# Altium PCB transistor_tester_V1.07_E3.PcbDoc (part 1 of 2)
Units mil, origin at the board's own origin, x right, y up, seen from the top; angles counter-clockwise.
Board outline 8661.42 x 7437.01 mil, 4 copper layers (Component Side, Ground Plane, Power Plane, Solder Side), stack 33.234 mil thick; 260 components, 161 nets, 897 pads, 860 vias.
Unrouted connection lines stored in the file: 9.
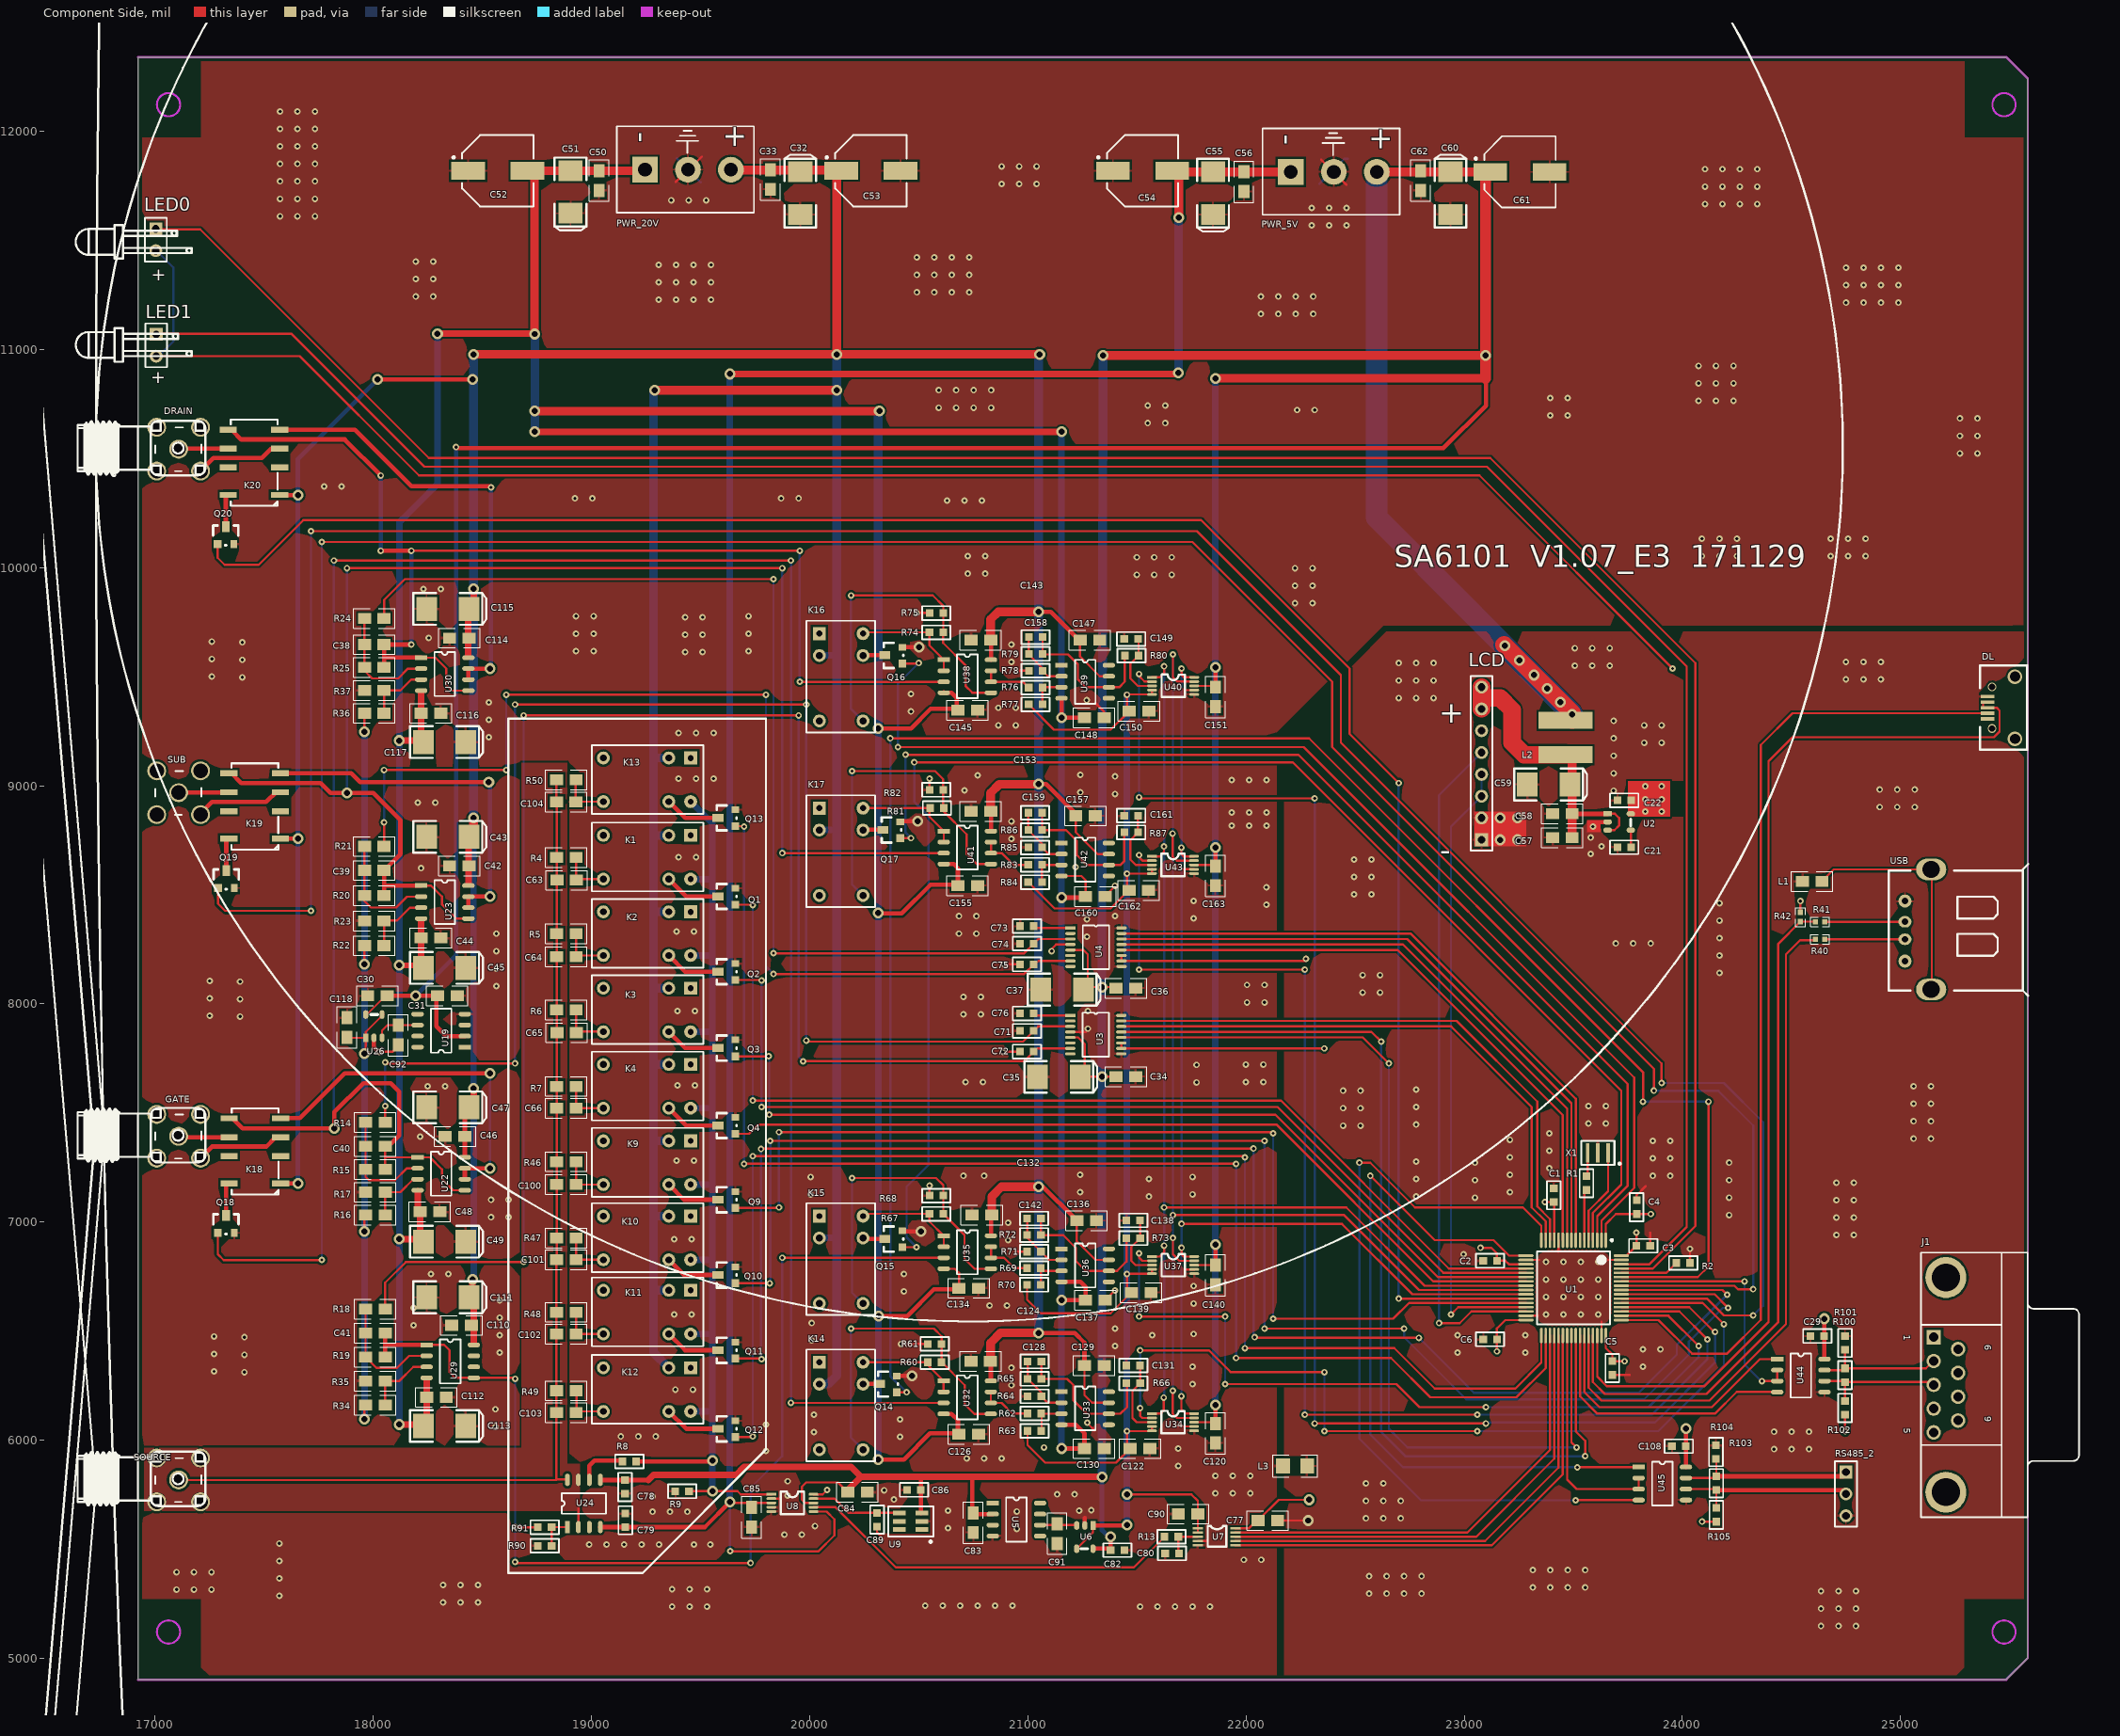
[diagram p0: Component Side view]
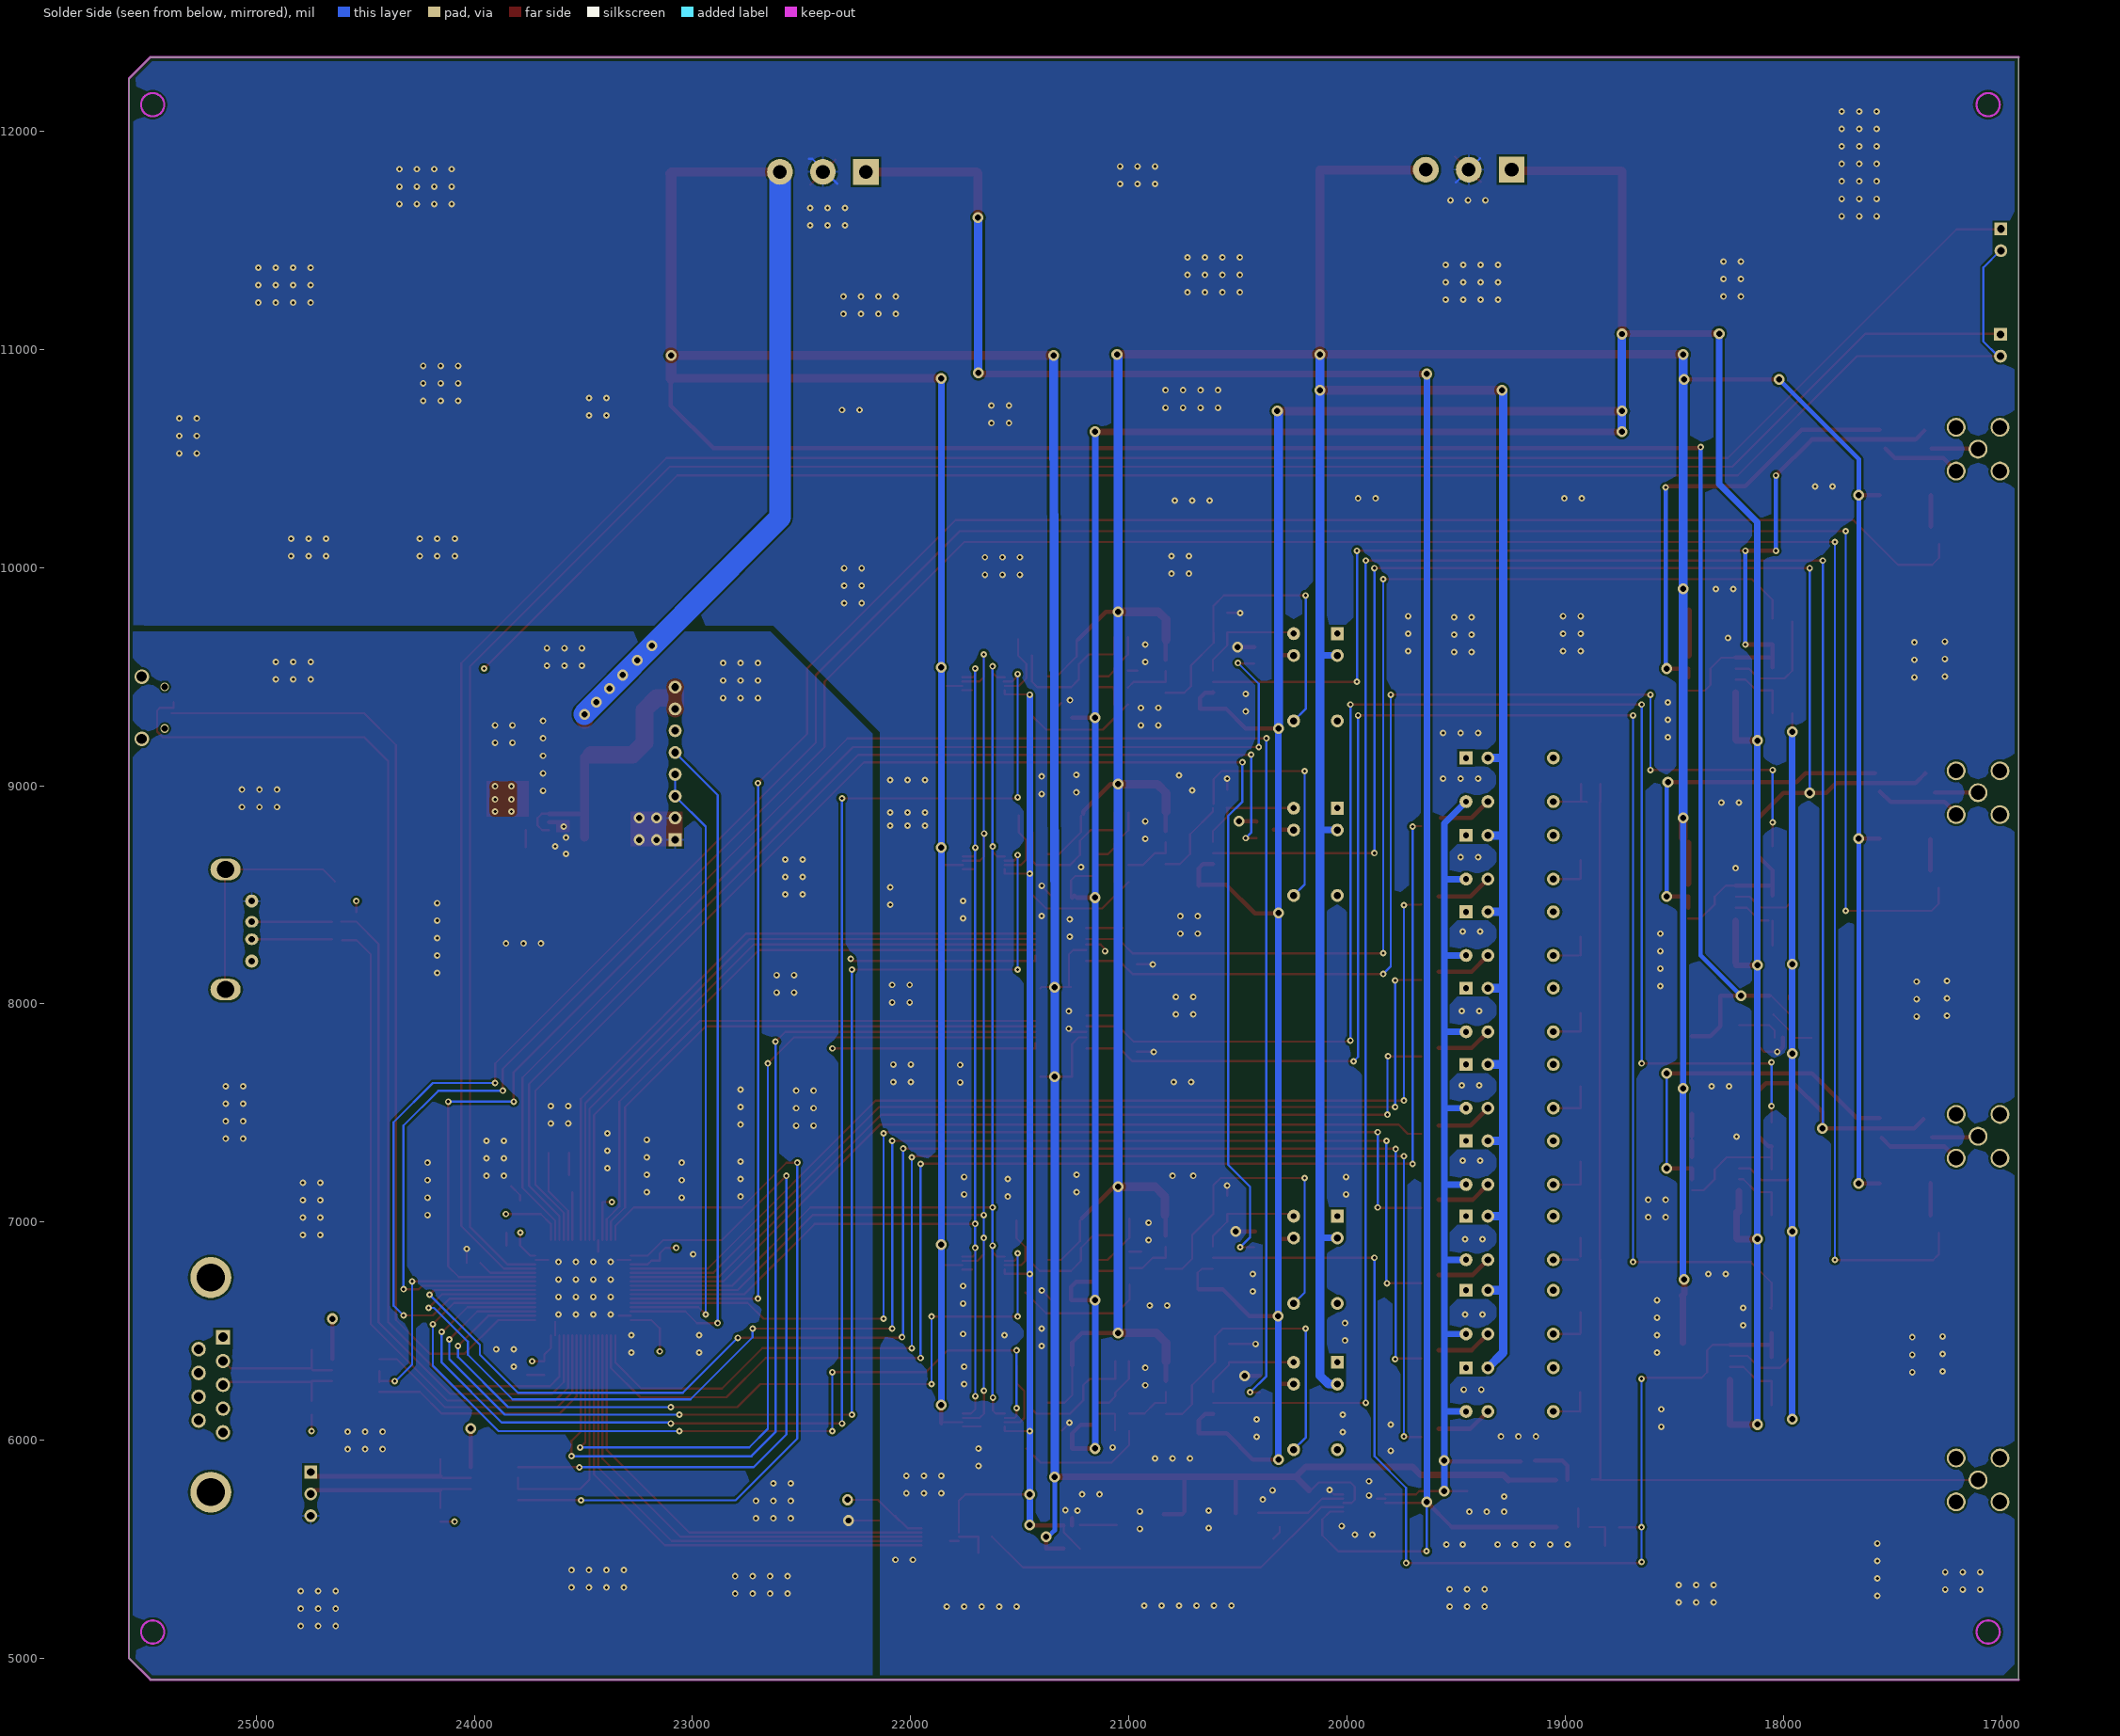
[diagram p1: Solder Side view, seen from below]
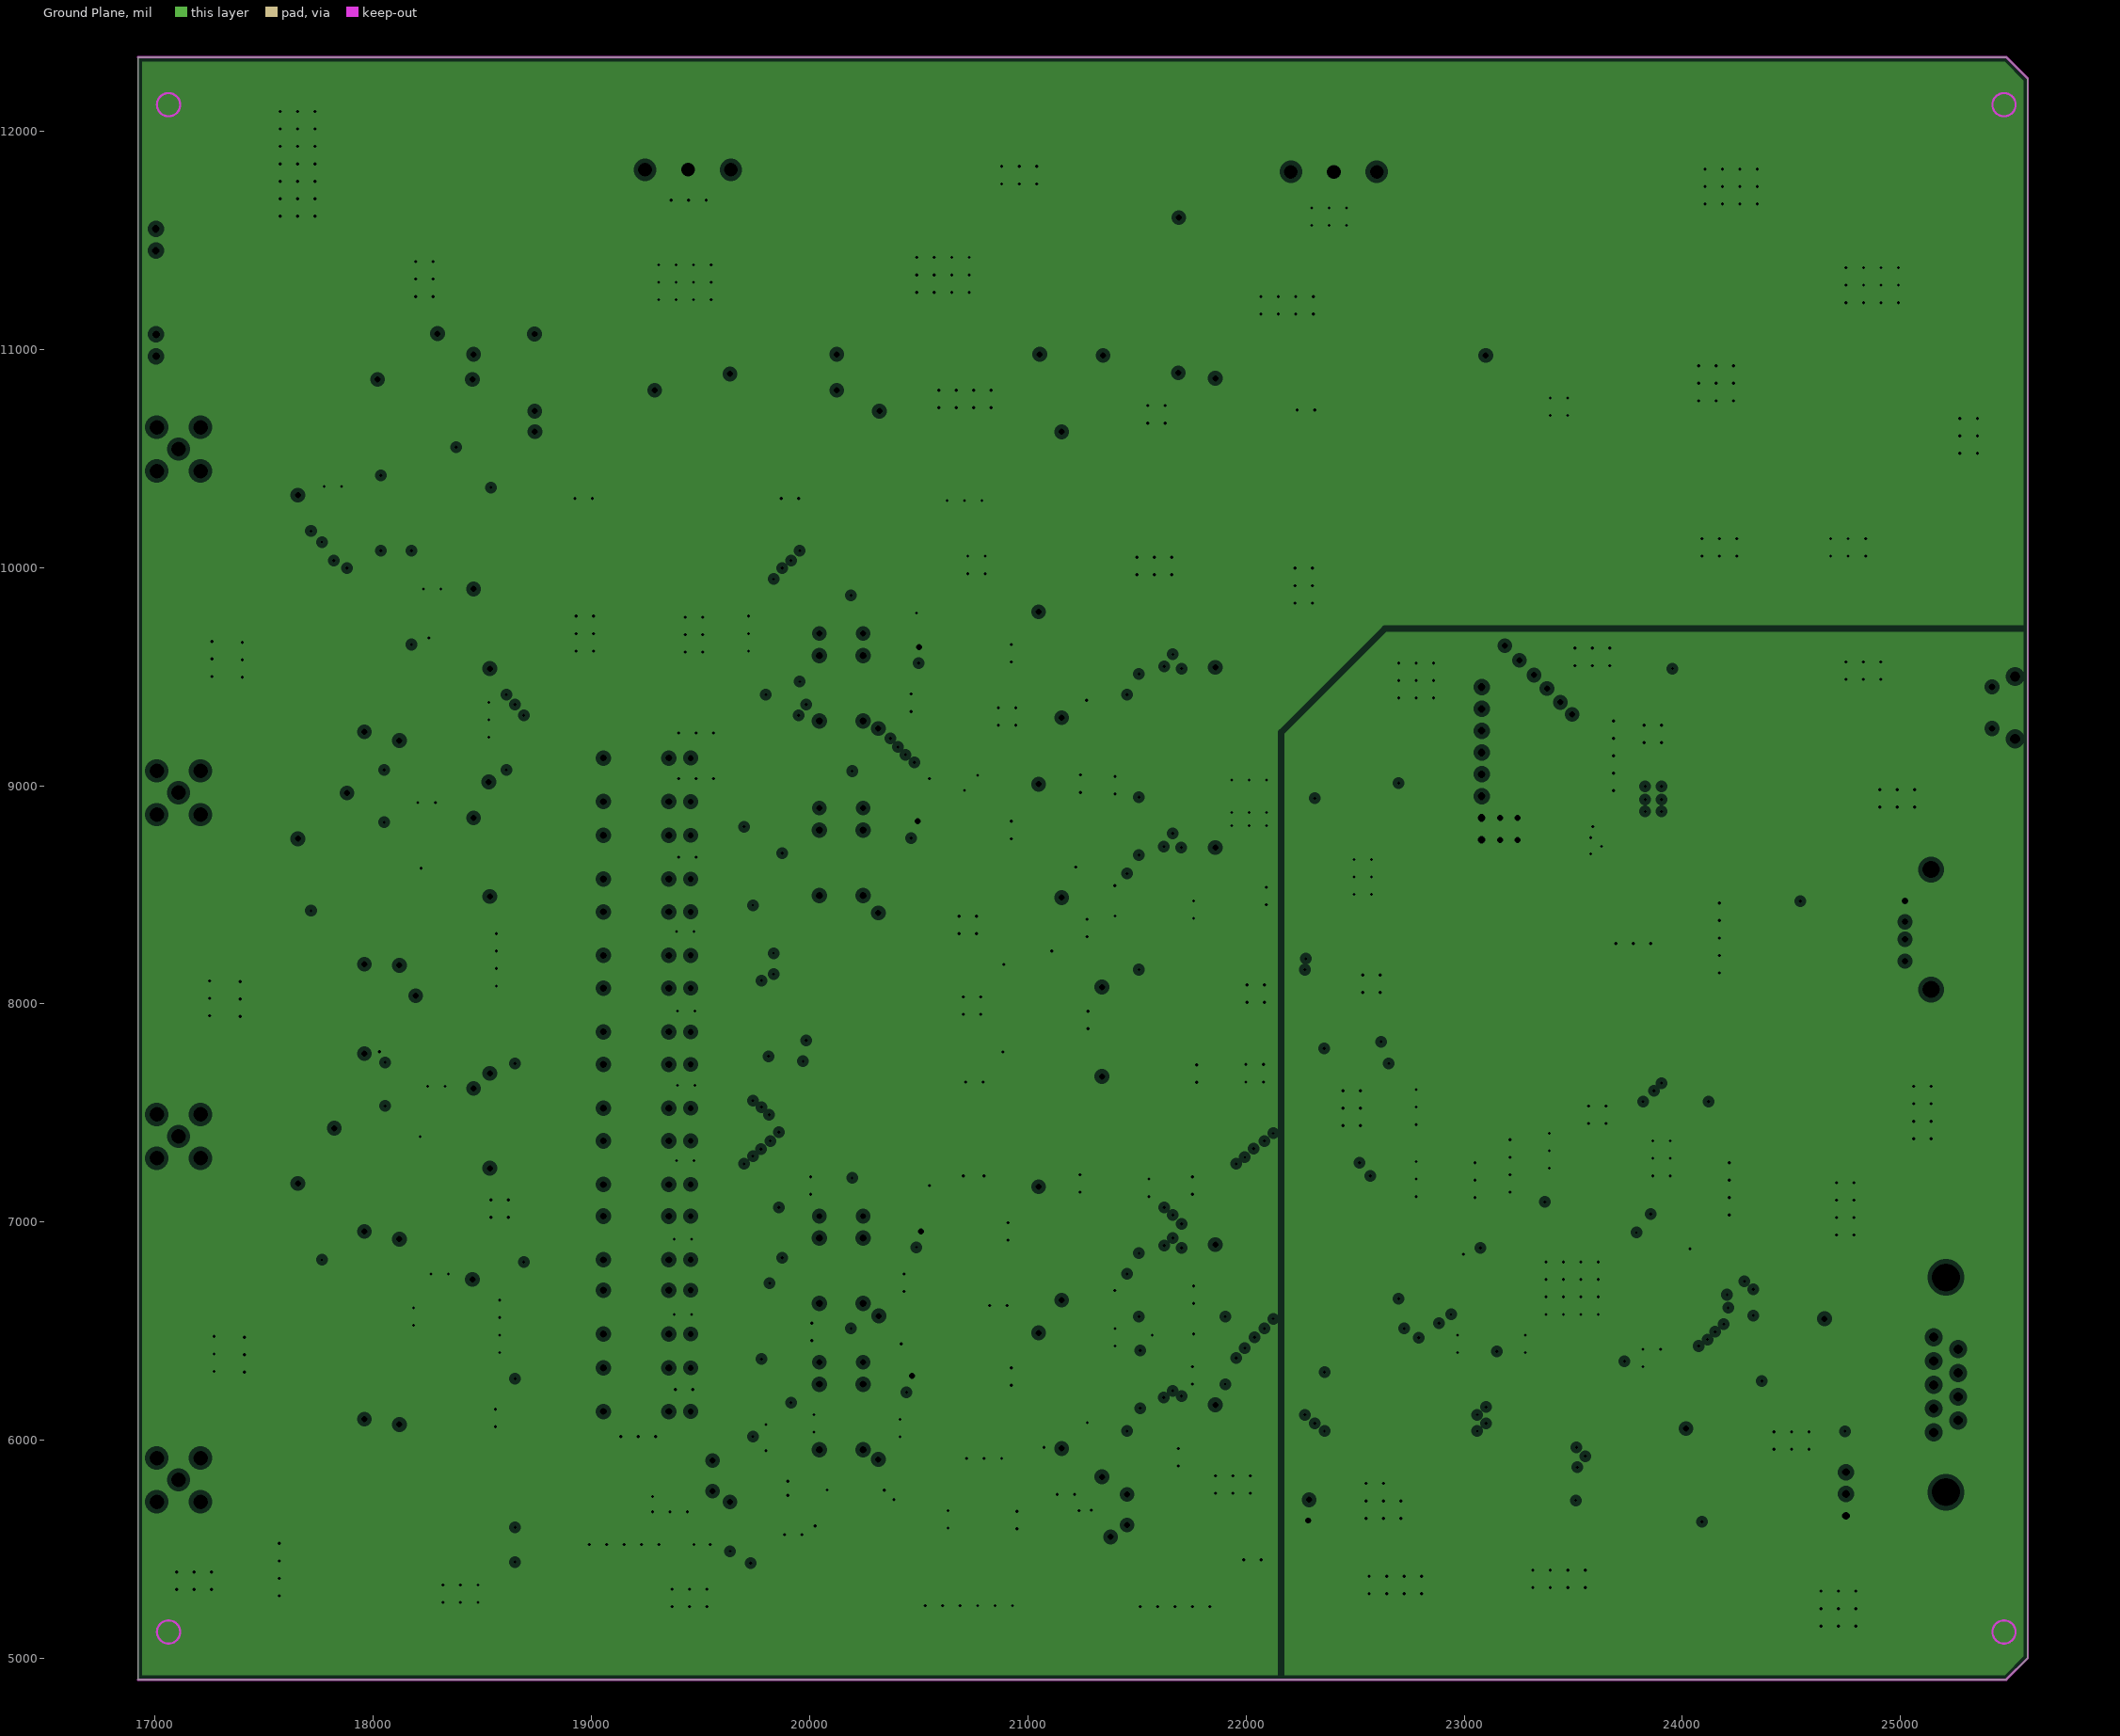
[diagram p2: Ground Plane, clearances drawn from the general rule]
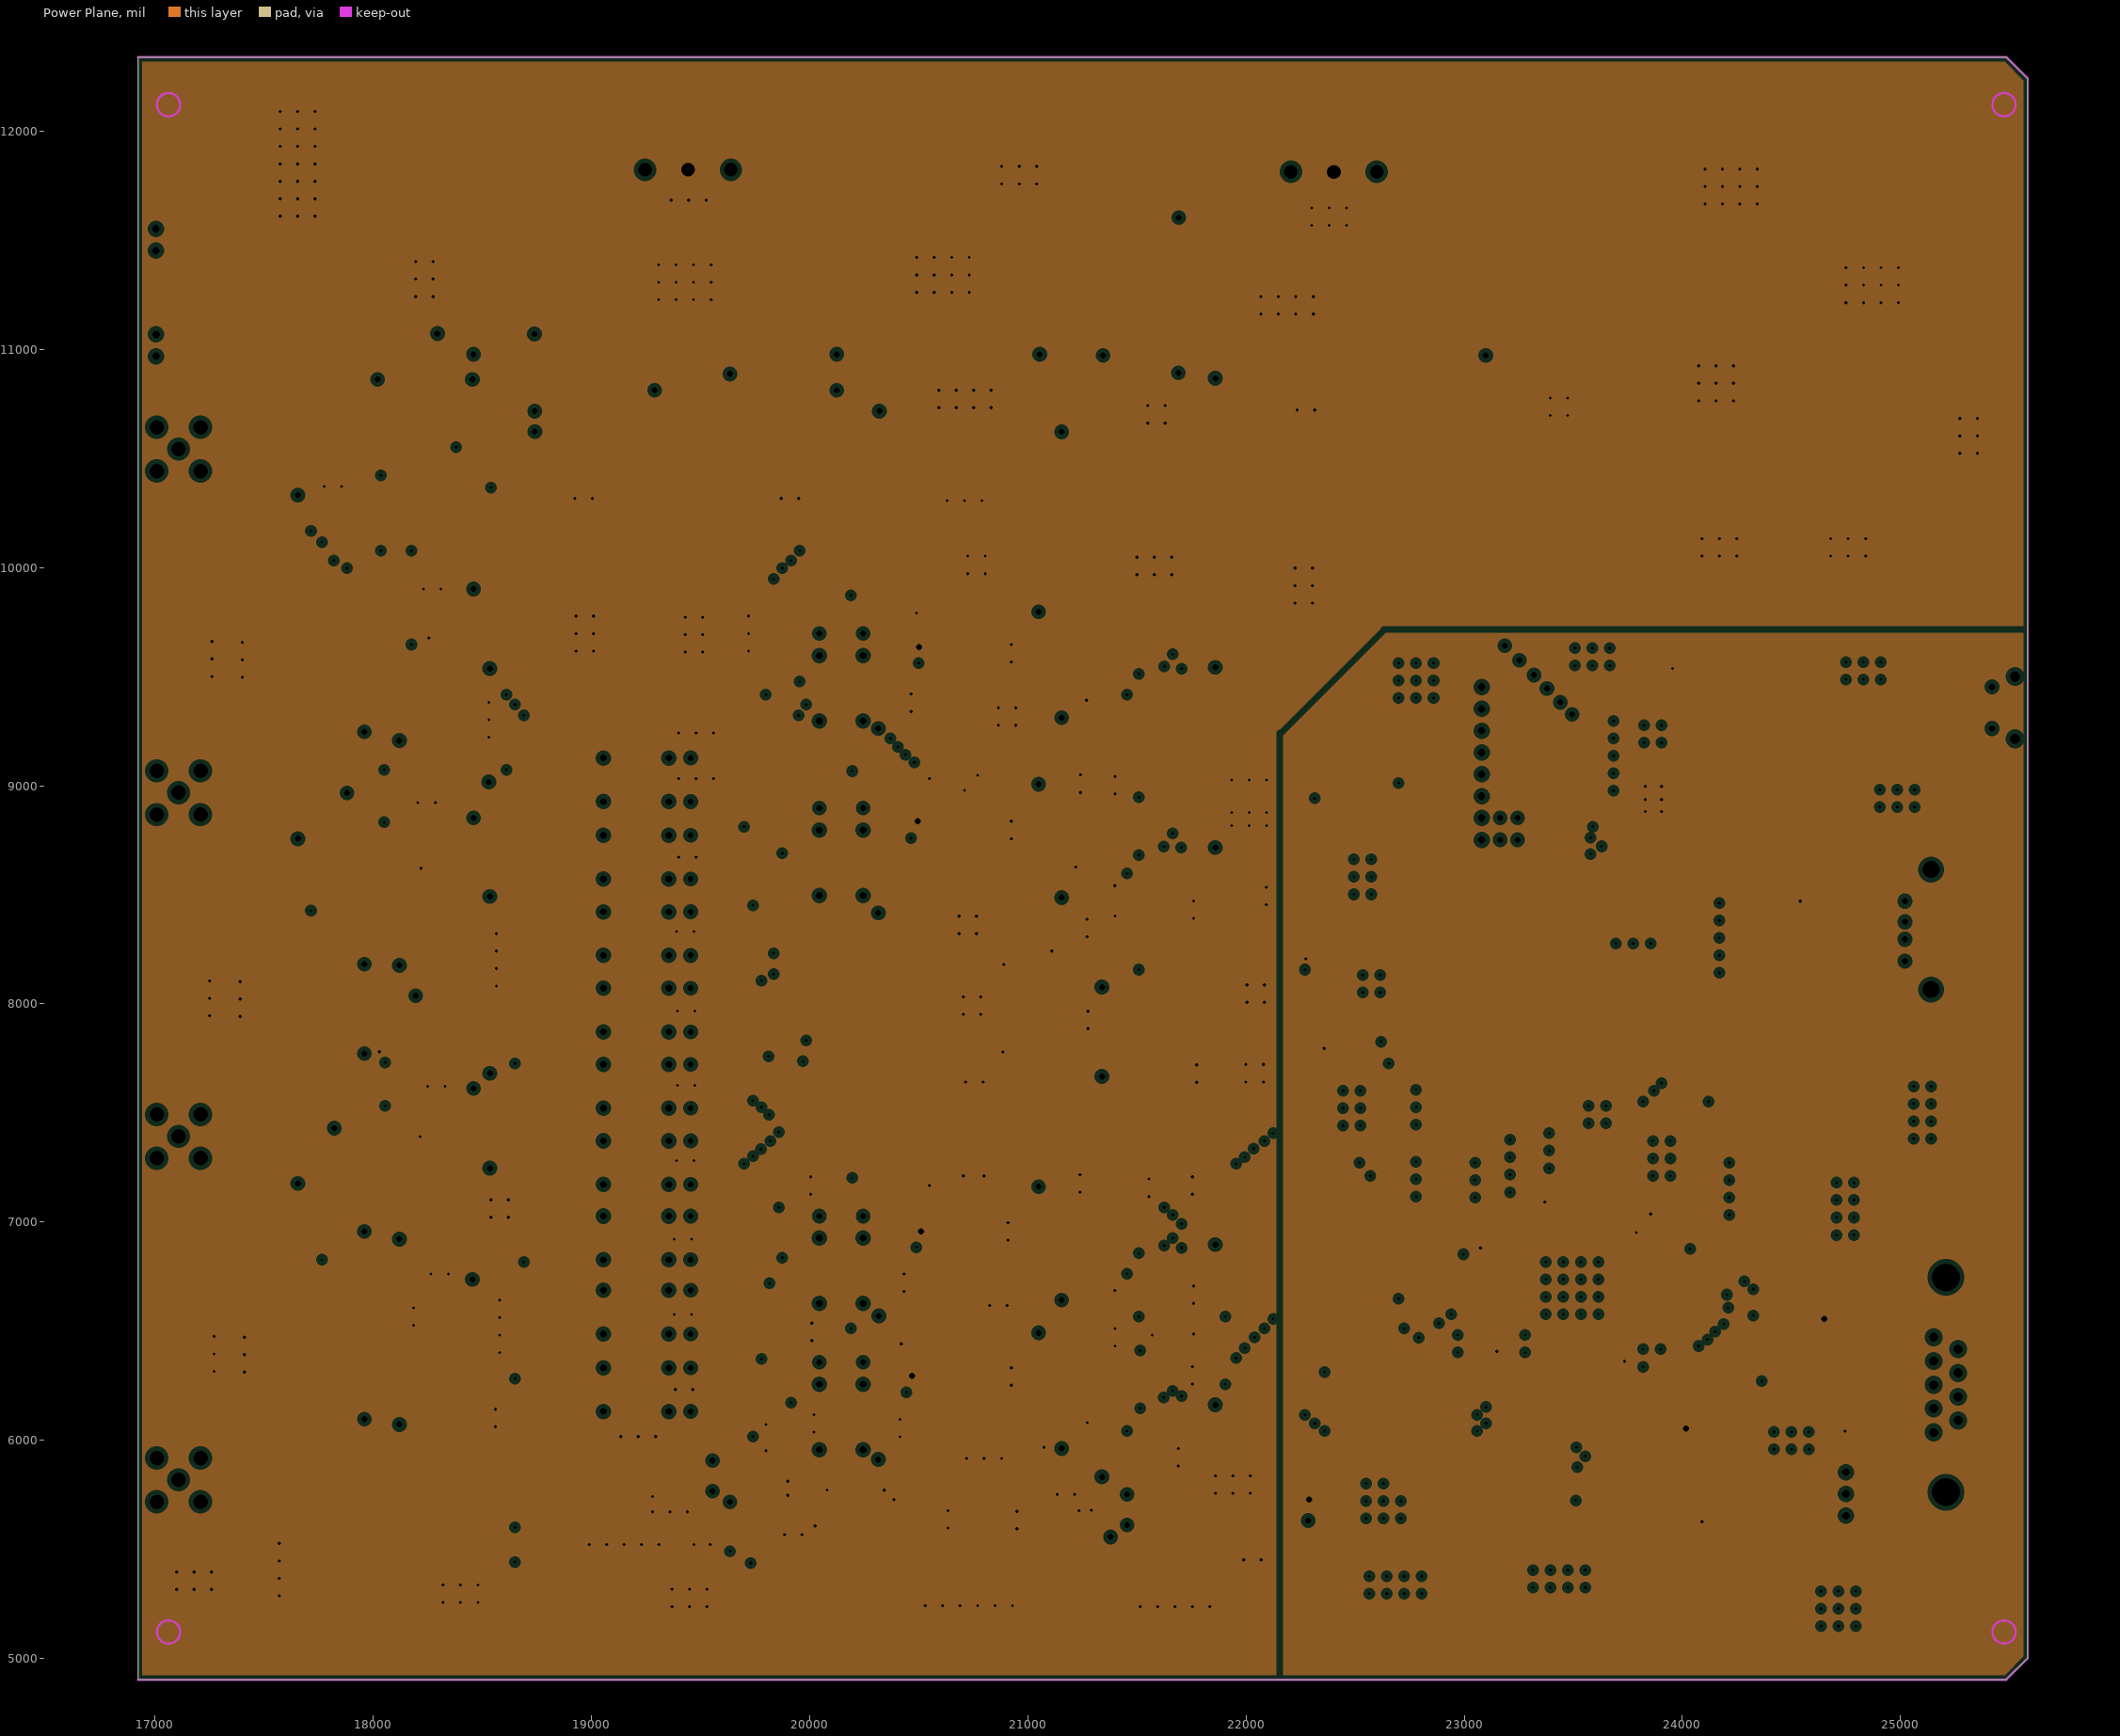
[diagram p3: Power Plane, clearances drawn from the general rule]

## Layer stack, top to bottom
Top Solder: solder mask 0.4, Solder Resist, Dk 3.5
Component Side: signal copper 1.4
Dielectric 1: core 12.6, FR-4, Dk 4.8
Ground Plane: plane copper 1.417, net (Multiple Nets)
Dielectric 3: prepreg 5, Dk 4.2
Power Plane: plane copper 1.417, net (Multiple Nets)
Dielectric 4: core 10, Dk 4.2
Solder Side: signal copper 1.4
Bottom Solder: solder mask 0.4, Solder Resist, Dk 3.5

## Board outline
16921.14,4902.94 25484.13,4902.94 25582.56,5001.36 25582.56,12241.52 25484.13,12339.95 16921.14,12339.95

## Design rules (kind name [scope] priority, off if disabled: settings)
Clearance [All] p1: gap=3
ComponentClearance [All] p1: gap=0 collisioncheckmode=3 verticalgap=0 showdistances=FALSE
PlaneClearance [All] p1: clearance=20
PlaneConnect PlaneConnect_GROUND [All] p1: planeconnectstyle=Relief reliefexpansion=20 reliefentries=4 reliefconductorwidth=10 reliefairgap=10
PlaneConnect "PlaneConnect _POWER" [All] p2: planeconnectstyle=Relief reliefexpansion=20 reliefentries=4 reliefconductorwidth=10 reliefairgap=10
PolygonConnect [IsVia] p1: connectstyle=Direct reliefconductorwidth=10 reliefentries=4 polygonreliefangle="90 Angle" airgapwidth=10
PolygonConnect PolygonConnect_1 [InNet('DGND')] p2: connectstyle=Relief reliefconductorwidth=10 reliefentries=4 polygonreliefangle="90 Angle" airgapwidth=10
PolygonConnect PolygonConnect_2 [InNet('AGND')] p3: connectstyle=Relief reliefconductorwidth=10 reliefentries=4 polygonreliefangle="90 Angle" airgapwidth=10
RoutingVias [All] p1: holewidth=28 width=50 viastyle="Through Hole" minholewidth=28 minwidth=50 maxholewidth=28 maxwidth=50
SolderMaskExpansion [All] p1: expansion=4
UnpouredPolygon UnpouredPolygon_1 [All] p1:
Width [All] p1: maxlimit=100 minlimit=10 preferedwidth=10
26 further rules are at their usual default settings.

## Components (designator, comment, footprint, x,y, rotation, side; value= is the part's Value field where it differs from the comment)
C1 "100nF" 0603 23414.38,7062.27 r180 top
C2 "100nF" 0603 23179.38,6827.27 r270 top
C3 "100nF" 0603 23759.38,6887.27 r90 top
C4 "100nF" 0603 23794.38,7007.27 r180 top
C5 "100nF" 0603 23674.38,6392.27 r0 top
C6 "1uF" 0603 23179.38,6467.27 r270 top
C21 "22nF" 0603 23794.38,8722.27 r270 top
C22 "1uF" 0603 23794.38,8937.27 r270 top
C29 "100nF" 0603 24679.38,6482.27 r270 top
C30 "100nF" 0805 18064.38,8037.27 r180 top
C31 "100nF" 0805 18294.38,8037.27 r0 top
C32 "10uF" 6032_POL 19955.31,11713.69 r90 top
C33 "100nF" 0805 19820.31,11733.69 r90 top
C34 "100nF" 0805 21404.38,7667.27 r0 top
C35 "10uF" 6032_POL 21139.38,7667.27 r0 top
C36 "100nF" 0805 21404.38,8072.27 r0 top
C37 "10uF" 6032_POL 21154.38,8067.27 r0 top
C38 "100pF" 0805 18049.38,9647.27 r180 top
C39 "100pF" 0805 18049.38,8612.27 r180 top
C40 "100pF" 0805 18054.38,7347.27 r180 top
C41 "100pF" 0805 17964.38,6492.27 r0 top
C42 "100nF" 0805 18439.38,8632.27 r180 top
C43 "10uF" 6032_POL 18339.38,8767.27 r0 top
C44 "100nF" 0805 18219.38,8302.27 r0 top
C45 "10uF" 6032_POL 18324.38,8167.27 r0 top
C46 "100nF" 0805 18419.38,7392.27 r180 top
C47 "10uF" 6032_POL 18339.38,7527.27 r0 top
C48 "100nF" 0805 18214.38,7047.27 r0 top
C49 "10uF" 6032_POL 18324.38,6912.27 r0 top
C50 "100nF" 0805 19035.31,11728.69 r90 top
C51 "10uF" 6032_POL 18905.31,11723.69 r270 top
C52 "47uF" cap_pol_8*10.2 18570.31,11818.69 r0 top
C53 "47uF" cap_pol_8*10.2 20280.31,11818.69 r0 top
C54 "47uF,50V" cap_pol_8*10.2 21525.31,11818.69 r0 top
C55 "10uF" 6032_POL 21850.31,11718.69 r270 top
C56 "1uF" 0805 21990.31,11813.69 r270 top
C57 "100nF" 0805 23494.38,8762.27 r180 top
C58 "1uF" 0805 23494.38,8872.27 r180 top
C59 "10uF" 6032_POL 23384.38,9007.27 r0 top
C60 "10uF" 6032_POL 22935.31,11713.69 r90 top
C61 "47uF,50V" cap_pol_8*10.2 23255.31,11813.69 r0 top
C62 "1uF" 0805 22800.31,11818.69 r270 top
C63 "47pF" 0805 18841.39,8567.27 r0 top
C64 "10pF" 0805 18839.38,8217.27 r0 top
C65 "5pF" 0805 18841.39,7868.44 r0 top
C66 "1pF" 0805 18839.38,7522.27 r0 top
C71 "100nF" 0603 20934.38,7872.27 r90 top
C72 "100nF" 0603 20934.38,7777.27 r90 top
C73 "100nF" 0603 20934.38,8352.27 r90 top
C74 "100nF" 0603 20934.38,8272.27 r90 top
C75 "100nF" 0603 20934.38,8177.27 r90 top
C76 "100nF" 0603 20934.38,7952.27 r90 top
C77 "100nF" 0805 22054.38,5632.27 r0 top
C78 "100nF" 0603 19149.38,5847.27 r0 top
C79 "100nF" 0603 19159.38,5572.27 r180 top
C80 "22nF" 0603 21599.38,5477.27 r90 top
C82 "100nF" 0603 21349.38,5492.27 r90 top
C83 "100nF" 0805 20749.38,5667.27 r270 top
C84 "100nF" 0805 20174.38,5762.27 r0 top
C85 "100nF" 0805 19734.38,5692.27 r270 top
C86 "100nF" 0603 20539.38,5777.27 r270 top
C89 "100nF" 0603 20304.38,5697.27 r0 top
C90 "10uF" 0805 21689.38,5662.27 r0 top
C91 "100nF" 0805 21134.38,5617.27 r270 top
C92 "100nF" 0805 18114.38,7902.27 r270 top
C100 "0.5pF" 0805 18839.38,7172.27 r0 top
C101 "NULL" 0805 18839.38,6827.27 r0 top
C102 "NULL" 0805 18839.38,6487.27 r0 top
C103 "NULL" 0805 18839.38,6127.27 r0 top
C104 "100pF" 0805 18839.14,8926.52 r0 top
C108 "100nF" 0603 24044.38,5977.27 r270 top
C110 "100nF" 0805 18449.38,6527.27 r180 top
C111 "10uF" 6032_POL 18339.38,6657.27 r0 top
C112 "100nF" 0805 18244.38,6197.27 r0 top
C113 "10uF" 6032_POL 18324.38,6067.27 r0 top
C114 "100nF" 0805 18439.38,9677.27 r180 top
C115 "10uF" 6032_POL 18339.38,9812.27 r0 top
C116 "100nF" 0805 18219.38,9332.27 r0 top
C117 "10uF" 6032_POL 18324.38,9202.27 r0 top
C118 "100nF" 0805 17879.38,7847.27 r90 top
C120 "100nF" 0805 21859.38,6077.27 r270 top
C122 "100nF" 0805 21469.38,5962.27 r0 top
C124 "100nF" 0805 20828.92,6362.27 r180 top
C126 "100nF" 0805 20684.38,6027.27 r0 top
C128 "10nF" 0603 20969.38,6357.27 r90 top
C129 "100nF" 0805 21259.38,6342.27 r0 top
C130 "100nF" 0805 21259.38,5962.27 r0 top
C131 "1nF" 0603 21544.38,6347.27 r270 top
C132 "100nF" 0805 20834.38,7032.27 r180 top
C134 "100nF" 0805 20684.38,6697.27 r0 top
C136 "100nF" 0805 21224.38,7007.27 r0 top
C137 "100nF" 0805 21264.38,6642.27 r0 top
C138 "1nF" 0603 21544.38,7012.27 r270 top
C139 "100nF" 0805 21474.38,6677.27 r0 top
C140 "100nF" 0805 21859.38,6802.27 r270 top
C142 "10nF" 0603 20967.33,7012.27 r90 top
C143 "100nF" 0805 20829.38,9667.27 r180 top
C145 "100nF" 0805 20679.38,9347.27 r0 top
C147 "100nF" 0805 21239.38,9667.27 r0 top
C148 "100nF" 0805 21259.38,9312.27 r0 top
C149 "1nF" 0603 21534.38,9677.27 r270 top
C150 "100nF" 0805 21464.38,9342.27 r0 top
C151 "100nF" 0805 21859.38,9452.27 r270 top
C153 "100nF" 0805 20829.38,8882.27 r180 top
C155 "100nF" 0805 20679.38,8542.27 r0 top
C157 "100nF" 0805 21219.38,8862.27 r0 top
C158 "10nF" 0603 20974.38,9677.27 r90 top
C159 "10nF" 0603 20972.33,8872.27 r90 top
C160 "100nF" 0805 21264.38,8492.27 r0 top
C161 "1nF" 0603 21534.38,8867.27 r270 top
C162 "100nF" 0805 21463.43,8521.32 r0 top
C163 "100nF" 0805 21859.38,8632.27 r270 top
DL "USB_5pin" USBmicro_B 25503.49,9367.27 r270 top
DRAIN "SMA" SMA 17007.31,10442.51 r90 top
GATE "SMA" SMA 17007.31,7292.91 r90 top
J1 "USART" DSUB1.385-2H9 25581.37,6254.22 r270 top
K1 "Relay" Relay_OMRON5V 19454.38,8772.27 r270 top
K2 "Relay" Relay_OMRON5V 19454.38,8422.27 r270 top
K3 "Relay" Relay_OMRON5V 19454.38,8072.27 r270 top
K4 "Relay" Relay_OMRON5V 19454.38,7722.27 r270 top
K9 "Relay" Relay_OMRON5V 19454.38,7372.27 r270 top
K10 "Relay" Relay_OMRON5V 19454.38,7027.27 r270 top
K11 "Relay" Relay_OMRON5V 19454.38,6687.27 r270 top
K12 "Relay" Relay_OMRON5V 19454.38,6332.27 r270 top
K13 "Relay" Relay_OMRON5V 19454.38,9127.27 r270 top
K14 "Relay" Relay_OMRON5V 20044.38,6357.27 r0 top
K15 "Relay" Relay_OMRON5V 20044.38,7027.27 r0 top
K16 "Relay" Relay_OMRON5V 20044.38,9697.27 r0 top
K17 "Relay" Relay_OMRON5V 20044.38,8897.27 r0 top
K18 "AXICOM IM" AXICOM_IM06 17450.86,7301.46 r90 top
K19 "AXICOM IM" AXICOM_IM06 17449.79,8882.48 r90 top
K20 "AXICOM IM" AXICOM_IM06 17446.62,10458.14 r90 top
L1 "10uH" 0805 24549.38,8562.27 r0 top
L2 "Bead" 8040 23464.38,9142.27 r0 top
L3 "10uH" 1206 22169.38,5882.27 r0 top
LCD "Header 8" HDR1X8 23079.38,8752.27 r90 top
LED0 "Header 2" HDR1X2 17003.35,11552.58 r270 top
LED1 "Header 2" HDR1X2 17004.94,11068.7 r270 top
PWR_5V "Header 3" PWR_3T 22205.31,11813.69 r90 top
PWR_20V "Header 3" PWR_3T 19245.31,11823.69 r90 top
Q1 "NUD3112" SOT-23 19539.38,8407.27 r90 top
Q2 "NUD3112" SOT-23 19539.38,8062.27 r90 top
Q3 "NUD3112" SOT-23 19539.38,7712.27 r90 top
Q4 "NUD3112" SOT-23 19539.38,7357.27 r90 top
Q9 "NUD3112" SOT-23 19539.38,7017.27 r90 top
Q10 "NUD3112" SOT-23 19539.38,6672.27 r90 top
Q11 "NUD3112" SOT-23 19539.38,6327.27 r90 top
Q12 "NUD3112" SOT-23 19539.38,5967.27 r90 top
Q13 "NUD3112" SOT-23 19539.38,8767.27 r90 top
Q14 "NUD3112" SOT-23 20278.92,6172.27 r90 top
Q15 "NUD3112" SOT-23 20304.38,6837.27 r90 top
Q16 "NUD3112" SOT-23 20304.38,9512.27 r90 top
Q17 "NUD3112" SOT-23 20294.38,8712.27 r90 top
Q18 "NUD3112" SOT-23 17239.51,7070.84 r0 top
Q19 "NUD3112" SOT-23 17240.56,8651.88 r0 top
Q20 "NUD3112" SOT-23 17238.58,10227.61 r0 top
R1 "100R" 0603 23564.38,7117.27 r180 top
R2 "10K" 0603 24064.38,6817.27 r270 top
R4 "100R_R" 0805 18929.38,8672.27 r180 top
R5 "1K_R" 0805 18929.38,8322.27 r180 top
R6 "10K_R" 0805 18929.38,7972.27 r180 top
R7 "100K" 0805 18929.38,7622.27 r180 top
R8 "0R" 0603 19234.38,5907.27 r270 top
R9 "1K" 0603 19354.38,5762.27 r90 top
R13 "100R" 0603 21719.38,5562.27 r270 top
R14 "5.1K" 0805 17964.38,7457.27 r0 top
R15 "51K" 0805 18054.38,7242.27 r180 top
R16 "5.1K" 0805 18054.38,7032.27 r180 top
R17 "51K" 0805 18054.38,7137.27 r180 top
R18 "5.1K" 0805 17964.38,6602.27 r0 top
R19 "51K" 0805 18054.38,6382.27 r180 top
R20 "51K" 0805 18049.38,8497.27 r180 top
R21 "5.1K" 0805 17959.38,8722.27 r0 top
R22 "5.1K" 0805 18049.38,8267.27 r180 top
R23 "51K" 0805 18049.38,8381.02 r180 top
R24 "5.1K" 0805 17959.38,9767.27 r0 top
R25 "51K" 0805 18049.38,9542.27 r180 top
R34 "5.1K" 0805 18054.38,6162.27 r180 top
R35 "51K" 0805 18054.38,6272.27 r180 top
R36 "5.1K" 0805 18049.38,9332.27 r180 top
R37 "51K" 0805 18049.38,9437.27 r180 top
R40 "22R" 0402 24524.38,8292.27 r90 top
R41 "22R" 0402 24524.38,8372.27 r90 top
R42 "1.5K" 0402 24544.38,8292.27 r180 top
R46 "1M" 0805 18929.38,7277.27 r180 top
R47 "10M_R" 0805 18929.38,6927.27 r180 top
R48 "100M_R" 0805 18929.38,6587.27 r180 top
R49 "1G_R" 0805 18929.38,6227.27 r180 top
R50 "51R_R" 0805 18929.38,9027.27 r180 top
R60 "9.1K" 0603 20633.92,6362.27 r270 top
R61 "1K" 0603 20511.88,6437.27 r90 top
R62 "1K" 0603 21091.43,6127.27 r270 top
R63 "1K" 0603 21091.43,6047.27 r270 top
R64 "1K" 0603 20969.38,6197.27 r90 top
R65 "1K" 0603 20969.38,6277.27 r90 top
R66 "2.2K" 0603 21422.33,6257.27 r90 top
R67 "9.1K" 0603 20641.43,7042.27 r270 top
R68 "1K" 0603 20519.38,7117.27 r90 top
R69 "1K" 0603 21089.38,6793.14 r270 top
R70 "1K" 0603 21089.38,6717.27 r270 top
R71 "1K" 0603 20967.33,6860.51 r90 top
R72 "1K" 0603 20967.33,6936.39 r90 top
R73 "2.2K" 0603 21422.33,6922.27 r90 top
R74 "9.1K" 0603 20641.43,9707.27 r270 top
R75 "1K" 0603 20519.38,9787.27 r90 top
R76 "1K" 0603 21096.43,9454.39 r270 top
R77 "1K" 0603 21096.43,9377.27 r270 top
R78 "1K" 0603 20974.38,9523.01 r90 top
R79 "1K" 0603 20974.38,9600.14 r90 top
R80 "2.2K" 0603 21414.38,9592.27 r90 top
R81 "9.1K" 0603 20644.38,8902.27 r270 top
R82 "1K" 0603 20519.38,8977.27 r90 top
R83 "1K" 0603 21094.38,8641.89 r270 top
R84 "1K" 0603 21094.38,8562.27 r270 top
R85 "1K" 0603 20972.33,8713.01 r90 top
R86 "1K" 0603 20972.33,8792.64 r90 top
R87 "2.2K" 0603 21412.33,8782.27 r90 top
R90 "0R" 0603 18724.38,5512.27 r90 top
R91 "Res1" 0603 18724.38,5597.27 r90 top
R100 "120" 0603 24749.38,6237.27 r180 top
R101 "NULL" 0603 24740.88,6507.27 r0 top
R102 "NULL" 0603 24749.38,6087.27 r180 top
R103 "120" 0603 24159.38,5742.27 r180 top
R104 "NULL" 0603 24149.38,6007.27 r0 top
R105 "NULL" 0603 24159.38,5597.27 r180 top
RS485_2 "Header 3" HDR1X3 24749.3,5854.22 r270 top
SOURCE "SMA" SMA 17007.31,5718.1 r90 top
SUB "SMA" SMA 17007.31,8867.71 r90 top
U1 "STM32F103RET6" LQFP64_N 23494.38,6697.27 r90 top
U2 "RT9193" SOT-23-5 23704.38,8832.27 r270 top
U3 "AD5687R" TSSOP16 21194.38,7947.27 r0 top
U4 "AD5687R" TSSOP16 21195.17,8348.05 r0 top
U5 "ADR441" SO-8N 20839.38,5712.27 r0 top
U6 "AD8601" SOT-23-5 21259.38,5562.27 r180 top
U7 "AD7988-1" MSOP10 21779.38,5597.27 r0 top
U8 "AD8253" RM-10 19824.38,5752.27 r0 top
U9 "ADR127-1.25" SOT_UJ6 20464.38,5622.27 r90 top
U19 "ADR441" SO-8N 18419.38,7802.27 r180 top
U22 "ADA4522-2" SO-8N 18202.84,7297.27 r0 top
U23 "ADA4522-2" SO-8N 18219.38,8542.27 r0 top
U24 "ADA5430" SO-8N 18889.38,5602.27 r90 top
U26 "AD8601" SOT-23-5 18004.38,7892.27 r0 top
U29 "ADA4522-2" SO-8N 18244.38,6437.27 r0 top
U30 "ADA4522-2" SO-8N 18219.38,9587.27 r0 top
U32 "ADA4522-2" SO-8N 20613.92,6272.27 r0 top
U33 "AD4522-1" SO-8N 21154.38,6222.27 r0 top
U34 "AD7791" RM-10 21568.92,6122.27 r0 top
U35 "ADA4522-2" SO-8N 20614.38,6937.27 r0 top
U36 "AD4522-1" SO-8N 21154.38,6877.27 r0 top
U37 "AD7791" RM-10 21569.38,6842.27 r0 top
U38 "ADA4522-2" SO-8N 20614.38,9577.27 r0 top
U39 "AD4522-1" SO-8N 21154.38,9552.27 r0 top
U40 "AD7791" RM-10 21569.38,9497.27 r0 top
U41 "ADA4522-2" SO-8N 20614.38,8792.27 r0 top
U42 "AD4522-1" SO-8N 21154.38,8737.27 r0 top
U43 "AD7791" RM-10 21568.43,8676.32 r0 top
U44 "SP3485" SO-8N 24434.38,6372.27 r0 top
U45 "SP3485" SO-8N 23799.38,5877.27 r0 top
USB "USB" USB_A 25227.53,8377.27 r0 top
X1 "8M smd" 8Mhz_XTAL 23659.38,7317.27 r180 top

## Footprints (in the part's own frame and the unit in brackets; to place one, negate y for a bottom-side part, rotate by r counter-clockwise, add the part's x,y. Pads: shape width x height; smd on the part's side, far side on the other; paste and mask are expansions set on the pad)
8Mhz_XTAL [mm]
  rect 0.4x2.2 smd: 1(0,0) 2(1.2,0) 3(2.4,0)
  silkscreen extent -1.45,-1.39 3.13,1.4
0402 [mil]
  rect 25x25 smd: 1(3.98,-127.99) 2(3.98,-84.98)
  silkscreen extent -19,-150 26,-63
0603 [mil]
  rect 35x35 smd: 1(4.25,-92.76) 2(4.25,-29.76)
  silkscreen extent -27,-126 36,4
0805 [mil]
  rect 60x50 smd: 1(90,0) 2(0,0)
  silkscreen extent -50,-45 140,45
1206 [mm]
  rect 1.6x1.8 smd: 1(0,0) 2(2.8,0)
  silkscreen extent -1.2,-1.3 4,1.3
6032_POL [mm]
  rect 2.4x2.8 smd: 1(2.538,-0.041) 2(-2.422,-0.041)
  silkscreen extent -3.95,-1.89 4.53,1.81
8040 [mm]
  rect 6.3x2 smd: 1(0,4) 2(0,0)
AXICOM_IM06 [mm]
  rect 0.7x2 smd: 1(-3.174,-3.174) 2(0.026,-3.174) 3(2.226,-3.174) 4(4.426,-3.174) 5(4.426,2.826) 6(2.226,2.826) 7(0.026,2.826) 8(-3.174,2.826)
  silkscreen extent -4.44,-2.92 5.59,2.54
cap_pol_8*10.2 [mm]
  rect 3.9x2.05 smd: 1(-3.443,-0.001) 2(3.457,-0.001)
  silkscreen extent -5.27,-4.15 4.16,4.15
DSUB1.385-2H9 [mm] "Connector; D Subminiature; 9 Position; Right Angle; Pitch 1.385 mm"
  rect 1.69x1.69 hole 1.09: 1(-5.54,-10.92)
  round 1.69 hole 1.09: 2(-2.77,-10.92) 3(0,-10.92) 4(2.77,-10.92) 5(5.54,-10.92) 6(-4.155,-8.08) 7(-1.385,-8.08) 8(1.385,-8.08) 9(4.155,-8.08)
  round 4.76 hole 3.26: 10(-12.495,-9.5) 11(12.495,-9.5)
  silkscreen extent -15.4,-12.4 15.4,6
HDR1X2 [mm] "Connector; Header; 2 Position"
  rect 1.5x1.5 hole 0.9: 1(0,0)
  round 1.5 hole 0.9: 2(2.54,0)
  silkscreen extent -1.27,-1.27 3.81,1.27
HDR1X3 [mm] "Connector; Header; 3 Position"
  rect 1.5x1.5 hole 0.9: 1(0,0)
  round 1.5 hole 0.9: 2(2.54,0) 3(5.08,0)
  silkscreen extent -1.27,-1.27 6.35,1.27
HDR1X8 [mm] "Connector; Header; 8 Position"
  rect 1.5x1.5 hole 0.9: 1(0,0)
  round 1.5 hole 0.9: 2(2.54,0) 3(5.08,0) 4(7.62,0) 5(10.16,0) 6(12.7,0) 7(15.24,0) 8(17.78,0)
  silkscreen extent -1.27,-1.27 19.05,1.27
LQFP64_N [mm]
  oval 1.8x0.3 smd: 1(5.586,-3.921) 2(5.586,-3.421) 3(5.586,-2.921) 4(5.586,-2.421) 5(5.586,-1.921) 6(5.586,-1.421) 7(5.586,-0.921) 8(5.586,-0.421) 9(5.586,0.079) 10(5.586,0.579) 11(5.586,1.079) 12(5.586,1.579) 13(5.586,2.079) 14(5.586,2.579) 15(5.586,3.079) 16(5.586,3.579) 33(-5.514,3.579) 34(-5.514,3.079) 35(-5.514,2.579) 36(-5.514,2.079) 37(-5.514,1.579) 38(-5.514,1.079) 39(-5.514,0.579) 40(-5.514,0.079) 41(-5.514,-0.421) 42(-5.514,-0.921) 43(-5.514,-1.421) 44(-5.514,-1.921) 45(-5.514,-2.421) 46(-5.514,-2.921) 47(-5.514,-3.421) 48(-5.514,-3.921)
  oval 0.3x1.8 smd: 17(3.786,5.379) 18(3.286,5.379) 19(2.786,5.379) 20(2.286,5.379) 21(1.786,5.379) 22(1.286,5.379) 23(0.786,5.379) 24(0.286,5.379) 25(-0.214,5.379) 26(-0.714,5.379) 27(-1.214,5.379) 28(-1.714,5.379) 29(-2.214,5.379) 30(-2.714,5.379) 31(-3.214,5.379) 32(-3.714,5.379) 49(-3.714,-5.721) 50(-3.214,-5.721) 51(-2.714,-5.721) 52(-2.214,-5.721) 53(-1.714,-5.721) 54(-1.214,-5.721) 55(-0.714,-5.721) 56(-0.214,-5.721) 57(0.286,-5.721) 58(0.786,-5.721) 59(1.286,-5.721) 60(1.786,-5.721) 61(2.286,-5.721) 62(2.786,-5.721) 63(3.286,-5.721) 64(3.786,-5.721)
  silkscreen extent -4.21,-4.75 5.71,4.08, body extent -4.96,-5.17 5.04,4.83, height 1.6
MSOP10 [mm]
  rect 1.2x0.25 smd: 1(0,0) 2(0,-0.5) 3(0,-1) 4(0,-1.5) 5(0,-2) 6(4.35,-2) 7(4.35,-1.5) 8(4.35,-1) 9(4.35,-0.5) 10(4.35,0)
  silkscreen extent 1.14,-2.16 3.3,0.25
PWR_3T [mm]
  rect 3x3 hole 1.6: 1(0,0)
  round 3 hole 1.6: 2(0,-5) 3(0,-10)
  silkscreen extent -5,-12.67 5.05,3.3
Relay_OMRON5V [mm]
  rect 1.5x1.5 hole 0.7: 1(0,0)
  round 1.5 hole 0.8: 2(0,-2.54) 3(0,-10.16) 4(5.08,-10.16) 5(5.08,-2.54)
  round 1.5 hole 0.7: 6(5.08,0)
  silkscreen extent -1.5,-11.5 6.5,1.5
RM-10 [mm]
  rect 1.143x0.33 smd: 1(0,0)
  oval 1.143x0.33 smd: 2(0,-0.5) 3(0,-1) 4(0,-1.5) 5(0,-2) 6(4.9,-2) 7(4.9,-1.5) 8(4.9,-1) 9(4.9,-0.5) 10(4.9,0)
  silkscreen extent 1.1,-2.31 3.81,0.32
SMA [mm]
  round 2.2 hole 1.7: 1(2.55,-2.55) 2(0,0) 2(0,-5.1) 2(5.1,-5.1) 2(5.1,0)
  silkscreen extent -0.03,-5.21 5.08,0.18
SO-8N [mm]
  rect 1.44x0.55 smd: 1(0,0)
  oval 1.44x0.55 smd: 2(0,-1.28) 3(0,-2.56) 4(0,-3.84) 5(5.5,-3.84) 6(5.5,-2.56) 7(5.5,-1.28) 8(5.5,0)
  silkscreen extent 1.55,-4.48 3.95,0.64
SOT-23 [mil]
  rect 36x36 smd: 1(47.75,-120.28)
  rect 30x36 smd: 2(122.75,-120.28)
  rect 36x50 smd: 3(85.75,-40.28)
  silkscreen extent 28,-125 143,-35
SOT-23-5 [mm]
  rect 0.6x1 smd: 1(-0.995,-1.201)
  oval 0.6x1 smd: 2(-0.045,-1.201) 3(0.905,-1.201) 4(0.905,1.499) 5(-0.995,1.499)
  silkscreen extent -0.4,1.5 0.4,1.5, body extent -1.5,-1.3 1.4,1.5, height 1.2
SOT_UJ6 [mm] "also adaptable to TSOT_UJ6"
  rect 0.55x1.5 smd: 1(-0.787,-1.27) 2(0.163,-1.27) 3(1.113,-1.27) 4(1.113,1.35) 5(0.163,1.35) 6(-0.787,1.35)
  silkscreen extent -2.34,-2.62 1.88,2.67
TSSOP16 [mm]
  rect 1.2x0.36 smd: 1(0,0)
  oval 1.2x0.36 smd: 2(0,-0.64) 3(0,-1.28) 4(0,-1.92) 5(0,-2.56) 6(0,-3.2) 7(0,-3.84) 8(0,-4.48) 9(5.94,-4.48) 10(5.94,-3.84) 11(5.94,-3.2) 12(5.94,-2.56) 13(5.94,-1.92) 14(5.94,-1.28) 15(5.94,-0.64) 16(5.94,0)
  silkscreen extent 1.43,-4.8 4.5,0.32
USB_A [mil] "USB A type Connector"
  round 60 hole 30: 1(-207.63,-180.91) 4(-207.63,94.09)
  oval 60x52.13 hole 30: 2(-207.63,-80.91) 3(-207.63,-0.91)
  oval 137.79x98.42 hole 78.74: 5(-87.63,239.09) 6(-87.63,-310.91)
  silkscreen extent -282,-341 357,264
USBmicro_B [mm]
  rect 0.4x1.6 smd: 1(1.542,-2.679) 2(0.892,-2.679) 3(0.242,-2.679) 4(-0.408,-2.679) 5(-1.058,-2.679)
  silkscreen extent -4.67,-3.56 5.12,1.93

## Part data
C1 C2 C3 C4 C5 C6 C21 C22 C29 C30 C31 C33 C34 C36 C38 C39 C40 C41 C42 C44 C46 C48 C50 C58 C63 C64 C65 C66 C71 C72 C73 C74 C75 C76 C78 C79 C80 C82 C83 C84 C85 C86 C89 C90 C91 C92 C100 C101 C102 C103 C104 C108 C110 C112 C114 C116 C118 C124 C126 C128 C129 C130 C132 C134 C136 C137 C142 C143 C145 C147 C148 C153 C155 C157 C158 C159 C160: library part Cap, "Capacitor"
C32 C35 C37 C43 C45 C47 C49 C51 C52 C53 C54 C55 C59 C60 C61 C111 C113 C115 C117: library part "Cap Pol1", "Polarized Capacitor (Radial)"
C56 C57 C62 C77 C120 C122 C131 C138 C139 C140 C149 C150 C151 C161 C162 C163: library part Cap, "Capacitor,100V"
DRAIN GATE SOURCE SUB: library part BNC, "BNC Elbow Connector"
J1: library part "D Connector 9", "Receptacle Assembly, 9 Position, Right Angle"
K1 K2 K3 K4 K9 K10 K11 K12 K13 K14 K15 K16 K17: library part Relay_OMRON5V, "Relay OMRON"
K18 K19 K20: library part "AXiCOM IM05"
L1 L2 L3: library part Inductor, "Inductor"
LCD: "Header, 8-Pin"
LED0 LED1: "Header, 2-Pin"
PWR_5V PWR_20V RS485_2: "Header, 3-Pin"
Q1 Q2 Q3 Q4 Q9 Q10 Q11 Q12 Q13 Q14 Q15 Q16 Q17 Q18 Q19 Q20: library part NUD3105, "Relay Driver 5V Supply"
R1 R2 R4 R5 R6 R7 R8 R9 R13 R14 R15 R16 R17 R18 R19 R20 R21 R22 R23 R24 R25 R34 R35 R36 R37 R40 R41 R42 R46 R47 R48 R49 R50 R60 R61 R62 R63 R64 R65 R66 R67 R68 R69 R70 R71 R72 R73 R74 R75 R76 R77 R78 R79 R80 R81 R82 R83 R84 R85 R86 R87 R90 R100 R101 R102 R103 R104 R105: library part Res1, "Resistor"
R91: "Resistor"
U1: library part STM32F103RBT6, "STM32 ARM-based 32-bit MCU with 128 Kbytes Flash, 64-pin LQFP, Industrial Temperature"
U5 U19: "Ultralow Noise, XFET Voltage References"
U6 U26: "Precision CMOS, Single Supply, Rail to Rail, Windband Operational Amplifiers"
U9: library part ADR127
U22 U23 U29 U30 U32 U35 U38 U41: library part AD8676
U33 U36 U39 U42: library part OP27
U34 U37 U40 U43: "One channel 24 bits ADC"
USB: library part USB_Normal, "USB interface"

## Via types
v1: diameter 30/30 (per signal layer), hole 14, Component Side to Solder Side, 720 vias
v2: diameter 50, hole 28, Component Side to Solder Side, 86 vias
v3: diameter 30, hole 14, Component Side to Solder Side, 50 vias
v4: diameter 66.93, hole 47.24, Component Side to Solder Side, 2 vias
v5: diameter 39.37, hole 29.53, Component Side to Solder Side, 2 vias

## Nets (pads, with @x,y where several pads share a name; then routed paths per layer and width w, separated by ;. In a path a pad name is that pad's centre, name@x,y a point inside that pad or via, vN(x,y) a via of type N, cw(c..) or ccw(c..) an arc to the next point about the centre after c; other vN are vias at no path point)
1.25V: C89.2 U8.9 U9.4 | length 412.4
  Component Side w10: U8.9@20017.29,5732.58 20114.06,5732.58 20179.38,5667.27 C89.2@20303.63,5667.27 ; C89.2@20308.63,5667.5 U9.4@20407.66,5667.5
2.5V_2: C90.1 C122.2 C139.2 C150.2 C162.2 R63.1 R70.1 R77.1 R84.1 U6.1 U6.4 U7.1 U7.2 U34.4 U34.5 U37.4 U37.5 U40.4 U40.5 U43.4 U43.5 | length 7675.9
  Component Side w10: R70.1@20996.62,6713.01 20996.62,6645.02 21059.38,6582.27 21379.38,6582.27 C139.2@21474.38,6677.27 ; R63.1@20998.67,6043.01 20998.67,5977.97 21079.38,5897.27 21404.38,5897.27 C122.2@21469.38,5962.27 ; R84.1@21001.62,8558.01 21122.37,8437.27 21379.38,8437.27 C162.2@21463.43,8521.32 ; R77.1@21003.67,9373.01 21119.38,9257.27 21379.38,9257.27 C150.2@21459.38,9337.27 ; U6.4@21223.75,5503.25 21298.55,5578.05 U6.1@21298.55,5609.55 ; v2(21454.38,5752.27) 21749.38,5752.27 21779.38,5722.27 C90.1@21779.38,5662.27 U7.1@21779.38,5597.27 U7.2@21779.38,5577.58 ; C122.2@21454.38,5977.27 v1(21454.38,6042.27) 21567.66,6042.27 U34.5@21568.92,6043.53 U34.4@21568.92,6063.21 ; C139.2@21454.38,6697.27 v1(21454.38,6762.27) ; C162.2@21454.38,8530.38 v1(21454.38,8597.27) 21568.12,8597.27 U43.5@21568.43,8597.58 U43.4@21568.43,8617.27 ; C150.2@21454.38,9342.27 v1(21454.38,9417.27) ; v1@21455.64,6763.53 U37.5@21569.38,6763.53 U37.4@21569.38,6783.21 ; v1@21455.64,9418.53 U40.5@21569.38,9418.53 U40.4@21569.38,9438.21
  Component Side w20: U6.1@21298.55,5609.55 v2@21452.1,5609.55
  Solder Side w30: v2(21454.38,5612.27) v2(21454.38,5752.27) v1(21454.38,6042.27) v1(21454.38,6762.27) v1(21454.38,8597.27) v1(21454.38,9417.27)
2.5V_BUF1: C118.2 R16.1 R22.1 R34.1 R36.1 U26.1 U26.4 | length 3764.5
  Component Side w10: C118.2@17869.38,7844.98 U26.1@17965.21,7844.98 ; v2(17959.38,6097.27) R34.1@17959.38,6157.27 ; v2(17959.38,6957.27) 17959.38,7017.27 17964.38,7022.27 R16.1@17959.38,7027.27 ; v2(17959.38,7772.27) 17965.21,7778.09 U26.1@17965.21,7844.98 ; v2(17959.38,8182.27) R22.1@17959.38,8267.27 ; v2(17959.38,9247.27) R36.1@17959.38,9332.27 ; U26.4@18045.01,7951.28 17965.21,7871.48 U26.1@17965.21,7844.98
  Solder Side w10: v2@17954.38,6957.27 v2(17959.38,6957.27)
  Solder Side w30: v2(17959.38,6097.27) v2(17959.38,6957.27) ; v2@17959.38,6962.27 v2(17959.38,7772.27) v2(17959.38,8182.27) v2(17959.38,9247.27)
5V: C30.2 C31.2 C34.2 C35.1 C36.2 C37.1 C60.1 C61.1 C62.2 C78.2 C82.2 C83.2 C84.2 C86.2 C120.2 C140.2 C151.2 C163.2 L2.1 PWR_5V.3 U3.5 U4.5 U5.2 U6.5 U8.8 U9.3 U19.2 U24.5 U26.5 U34.8 U37.8 U40.8 U43.8 | length 30815.1
  Component Side w10: U26.5@17970.21,7951.28 18056.19,8037.27 C30.2@18064.38,8037.27 ; C31.2@18289.38,8037.27 C31.2@18294.38,8037.27 ; U8.8@20017.29,5712.9 19978.75,5712.9 19964.38,5727.27 19964.38,5787.27 19984.38,5807.27 20129.38,5807.27 C84.2@20164.38,5772.27 ; U3.5@21194.38,7846.48 21230.17,7846.48 21259.84,7816.81 21259.84,7667.27 v2(21339.38,7667.27) C34.2@21404.38,7667.27 ; U4.5@21195.17,8247.27 21254.38,8247.27 21274.38,8227.27 C37.1@21274.38,8082.27 ; C37.1@21264.84,8077.27 v2(21339.38,8077.27) 21399.38,8077.27 C36.2@21404.38,8072.27 ; U43.8@21761.35,8636.95 C163.2@21854.69,8636.95 ; U34.8@21761.84,6082.9 C120.2@21849.38,6082.9 ; U37.8@21762.29,6802.9 C140.2@21849.38,6802.9 ; U40.8@21762.29,9457.9 C151.2@21834.38,9457.9
  Component Side w20: C30.2@18064.38,8037.27 v2(18194.38,8037.27) 18289.38,8037.27 18289.38,7897.27 18333.99,7852.66 U19.2@18419.38,7852.66 ; v3(18379.38,10552.27) 18384.38,10547.27 22904.38,10547.27 23099.38,10742.27 23099.38,10882.27 ; U24.5@19041.86,5817.5 C78.2@19153.63,5817.5 19259.62,5817.5 ; U9.3@20509.38,5666.07 20509.38,5832.27 ; C83.2@20744.38,5672.27 20744.38,5832.27 ; C83.2@20754.77,5661.87 U5.2@20839.38,5661.87 ; U6.5@21298.55,5503.25 C82.2@21378.4,5503.25 ; C82.2@21379.38,5504.23 v2(21379.38,5557.27) ; C120.2@21859.38,6077.27 v2(21859.38,6162.27) ; C140.2@21859.38,6802.27 v2@21859.38,6887.27 ; C163.2@21859.38,8632.27 v2(21859.38,8717.27) ; C151.2@21859.38,9452.27 v2@21859.38,9537.27
  Component Side w30: 19259.62,5817.5 19284.38,5842.27 19664.38,5842.27 19699.38,5877.27 20189.38,5877.27 20234.38,5832.27 ; C84.2@20174.38,5772.27 20234.38,5832.27 ; v2(21339.38,5832.27) 20744.38,5832.27 20509.38,5832.27 20234.38,5832.27
  Component Side w40: v2(21344.38,10972.27) v2(23098.3,10972.27) ; v2(21859.38,10867.27) 23098.3,10867.27 ; PWR_5V.3@22599.01,11813.69 C61.1@23089.82,11813.69
  Component Side w50: C61.1@23094.77,11808.69 C61.1@23099.23,11804.23 ; 23098.3,10867.27 v2(23098.3,10972.27) C61.1@23098.3,11804.39
  Component Side w80: v2@23182.83,9645.71 23494.38,9334.16 L2.1@23494.38,9302.27
  Solder Side w20: v2(18194.38,8037.27) 18379.38,8222.27 v3(18379.38,10552.27) ; v2(21339.38,5832.27) 21339.38,5587.27 v2@21369.38,5557.27
  Solder Side w30: v2(21859.38,6162.27) v2(21859.38,6897.27) v2(21859.38,8717.27) v2(21859.38,9542.27) v2(21859.38,10867.27)
  Solder Side w40: v2(21339.38,5832.27) v2(21339.38,7667.27) v2(21339.38,8077.27) v2(21344.38,10972.27) ; v2(23494.38,9327.27) v2@23499.38,9322.27
  Solder Side w100: PWR_5V.3@22598.08,11814.21 22598.08,10230.55 v2@23495.37,9328.25
  other v2: 23440.91,9382.27 23379.38,9445.55 23319.38,9507.27 23253.02,9575.52 23186.28,9642.27
+20V: C32.1 C33.1 C42.2 C43.1 C46.2 C47.1 C53.1 C110.2 C111.1 C114.2 C115.1 C124.2 C129.2 C132.2 C136.2 C143.2 C147.2 C153.2 C157.2 K1.2 K2.2 K3.2 K4.2 K9.2 K10.2 K11.2 K12.2 K13.2 K14.2 K15.2 K16.2 K17.2 K18.1 K19.1 K20.1 PWR_20V.3 U22.8 U23.8 U29.8 U30.8 U32.8 U33.7 U35.8 U36.7 U38.8 U39.7 U41.8 U42.7 | length 32931.5
  Component Side w10: v2@18454.84,7617.72 v2(18459.84,7612.72) ; C132.2@20830.91,7028.8 C132.2@20834.38,7032.27 ; C157.2@21219.38,8862.27 21219.38,8787.27 21319.77,8686.87 U42.7@21370.91,8686.87 ; C136.2@21224.38,7007.27 21224.38,6912.27 21309.77,6826.87 U36.7@21370.91,6826.87 ; C147.2@21239.38,9667.27 21239.38,9592.27 21329.77,9501.87 U39.7@21370.91,9501.87 ; C129.2@21259.38,6342.27 21259.38,6207.27 21294.77,6171.87 U33.7@21370.91,6171.87
  Component Side w20: K18.1@17559.33,7177.31 v2(17654.33,7177.31) ; K19.1@17559.33,8757.31 v2(17654.33,8757.31) ; K20.1@17559.33,10332.31 v2(17654.33,10332.31) ; v2(18019.38,10862.27) v2(18454.38,10862.27) ; U22.8@18419.38,7297.27 C46.2@18419.38,7372.27 ; C46.2@18419.38,7392.27 C47.1@18419.38,7496.81 ; U32.8@20830.46,6272.27 C124.2@20830.46,6353.8 ; U35.8@20830.91,6937.27 C132.2@20830.91,7028.8 ; U41.8@20830.91,8792.27 C153.2@20830.91,8873.8 ; U38.8@20830.91,9577.27 C143.2@20830.91,9658.8 ; v2(21048.92,6492.27) 21214.38,6492.27 21259.38,6447.27 C129.2@21259.38,6342.27 ; v2(21049.38,7162.27) 21069.38,7162.27 C136.2@21214.38,7017.27 ; v2(21049.38,9007.27) 21084.38,9007.27 21209.38,8882.27 C157.2@21209.38,8872.27 ; v2(21049.38,9797.27) 21104.38,9797.27 C147.2@21231.88,9669.77
  Component Side w30: U30.8@18434.84,9597.27 C115.1@18434.84,9802.27 ; U23.8@18435.91,8552.27 C43.1@18435.91,8738.34 ; v2(18454.38,6737.27) 18454.38,6672.27 18464.38,6662.27 C111.1@18459.38,6657.27 ; C111.1@18459.38,6652.72 18459.84,6652.27 U29.8@18459.84,6447.27 ; C47.1@18459.84,7517.27 v2(18459.84,7612.72) ; C115.1@18459.84,9802.27 v2@18459.84,9902.27
  Component Side w40: C43.1@18459.38,8761.81 v2(18459.38,8852.27) ; v2(18459.38,10977.27) v2(20123.84,10977.27) ; v2(19289.38,10812.27) v2(20124.38,10812.27) ; PWR_20V.3@19639.01,11823.69 19640.31,11822.39 C53.1@20124.77,11822.39 ; C53.1@20123.84,11814.22 v2(20123.84,10977.27) ; C124.2@20828.92,6362.27 20828.92,6446.81 20874.38,6492.27 v2(21048.92,6492.27) ; C153.2@20829.38,8882.27 20829.38,8967.27 20869.38,9007.27 v2(21049.38,9007.27) ; C143.2@20829.38,9667.27 20829.38,9762.27 20864.38,9797.27 v2(21049.38,9797.27) ; C132.2@20834.38,7032.27 20834.38,7117.27 20879.38,7162.27 v2(21049.38,7162.27) ; v2(21054.38,10977.27) 21049.38,10982.27 21044.38,10977.27 v2(20123.84,10977.27)
  Solder Side w20: v2(17654.33,7177.31) v2(17654.33,8757.31) 17654.33,10497.22 v2(18019.38,10862.27)
  Solder Side w30: v2@18459.38,7617.27 v2(18459.38,8852.27) ; v2@18459.84,6742.72 v2(18459.84,7612.72) ; K16.2@20034.38,9597.27 K16.2@20044.38,9597.27 20104.38,9597.27 ; K15.2@20039.38,6927.27 K15.2@20044.38,6927.27 20109.38,6927.27 ; K17.2@20049.38,8797.27 20109.38,8797.27
  Solder Side w40: v2(18459.38,8852.27) v2(18459.38,9902.27) v2(18459.38,10977.27) ; v2(19289.38,10812.27) 19284.38,10807.27 19284.38,9127.27 ; K11.2@19354.38,6687.27 19284.38,6687.27 ; K10.2@19354.38,7027.27 19284.38,7027.27 ; K9.2@19354.38,7372.27 19284.38,7372.27 ; K4.2@19354.38,7722.27 19284.38,7722.27 ; K3.2@19354.38,8072.27 19284.38,8072.27 ; K2.2@19354.38,8422.27 19284.38,8422.27 ; K1.2@19354.38,8772.27 19284.38,8772.27 ; K13.2@19354.38,9127.27 19284.38,9127.27 ; K12.2@19359.38,6332.27 K12.2@19354.38,6332.27 19284.38,6402.27 19284.38,6687.27 ; K14.2@20044.38,6257.27 20084.38,6257.27 20123.84,6296.73 v2(20123.84,10977.27) ; v2@21049.38,6492.72 v2(21049.38,7162.27) v2(21049.38,9007.27) v2(21049.38,9797.27) v2@21049.38,10972.27 ; 19284.38,6687.27 19284.38,7027.27 ; 19284.38,7027.27 19284.38,7372.27 ; 19284.38,7372.27 19284.38,7722.27 ; 19284.38,7722.27 19284.38,8072.27 ; 19284.38,8072.27 19284.38,8422.27 ; 19284.38,8422.27 19284.38,8772.27 ; 19284.38,8772.27 19284.38,9127.27
-5V: C54.2 C55.2 C56.2 C79.2 C85.2 PWR_5V.1 U8.3 U8.6 U24.4 | length 10410.4
  Component Side w10: v1(19635.44,5491.58) 20040.71,5491.58 20113.27,5564.13 20113.27,5637.75 20078.12,5673.53 U8.6@20017.29,5673.53 ; v2@19638.75,5712.9 U8.3@19824.38,5712.9
  Component Side w20: U24.4@19040.56,5602.27 C79.2@19154.89,5602.27 ; C79.2@19155.13,5602.03 19519.14,5602.03 v2(19634.38,5717.27)
  Component Side w30: v2(19634.38,10887.27) v2@21694.38,10887.27
  Component Side w40: v2@21691.42,11598.69 C54.2@21691.42,11808.69 ; C54.2@21696.38,11813.69 C56.2@21990.31,11813.69 PWR_5V.1@22205.31,11813.69
  Solder Side w10: v1@19634.38,5489.95 v2(19634.38,5717.27)
  Solder Side w30: v2(19634.38,5717.27) v2(19634.38,10887.27)
  Solder Side w40: v2@21690.49,10887.27 v2@21690.49,11602.02
  other v2: 21689.38,10892.27 21691.42,11603.69
-20V: C44.2 C45.2 C48.2 C49.2 C50.1 C51.2 C52.2 C112.2 C113.2 C116.2 C117.2 C126.2 C130.2 C134.2 C137.2 C145.2 C148.2 C155.2 C160.2 PWR_20V.1 U22.4 U23.4 U29.4 U30.4 U32.4 U33.4 U35.4 U36.4 U38.4 U39.4 U41.4 U42.4 | length 25146.6
  Component Side w10: C113.2@18244.38,6072.27 C113.2@18246.92,6072.27 ; U35.4@20614.38,6786.08 20665.56,6786.08 20684.38,6767.27 C134.2@20684.38,6697.27 ; U42.4@21154.38,8586.08 21245.56,8586.08 21264.38,8567.27 C160.2@21264.38,8492.27
  Component Side w20: v2(20314.38,5912.27) 20431.84,5912.27 20551.84,6032.27 20679.38,6032.27 20679.38,6092.27 20650.56,6121.08 U32.4@20613.92,6121.08 ; v2(20314.38,9262.27) 20464.38,9262.27 20554.38,9352.27 20674.38,9352.27 20674.38,9402.27 20650.56,9426.08 U38.4@20614.38,9426.08 U38.4@20614.38,9427.27 ; v2(20316.84,6569.72) 20446.84,6569.72 20569.38,6692.27 C134.2@20679.38,6692.27 ; v2@20316.84,8414.81 20421.92,8414.81 20554.38,8547.27 C155.2@20674.38,8547.27 ; U41.4@20614.38,8641.08 20660.56,8641.08 20679.38,8622.27 C155.2@20679.38,8542.27 ; v2@21149.38,8487.27 v2(21154.38,8487.27) 21239.38,8487.27 21249.38,8497.27 C160.2@21259.38,8487.27 ; v2(21154.38,5962.27) C130.2@21259.38,5962.27 21259.38,6032.27 21220.56,6071.08 U33.4@21154.38,6071.08 ; v2(21154.38,6642.27) C137.2@21264.38,6642.27 21264.38,6702.27 21240.56,6726.08 U36.4@21154.38,6726.08 ; U39.4@21154.38,9396.08 v2(21154.38,9312.27) C148.2@21259.38,9312.27
  Component Side w25: v2(18119.38,8177.27) C45.2@18216.92,8177.27
  Component Side w30: v2(18119.38,6072.27) 18244.38,6072.27 C112.2@18244.38,6197.27 U29.4@18244.38,6277.27 ; v2(18119.38,6922.27) C49.2@18211.92,6922.27 ; v2(18119.38,9207.27) C117.2@18216.92,9207.27 ; C48.2@18204.38,7047.27 U22.4@18204.38,7142.27 ; C49.2@18214.38,6924.72 C48.2@18214.38,7047.27 ; C45.2@18219.38,8187.27 C44.2@18219.38,8302.27 U23.4@18219.38,8382.27 ; C117.2@18219.38,9209.72 C116.2@18219.38,9332.27 U30.4@18219.38,9427.27 ; v2(18294.38,11072.27) v2@18740.49,11072.27 ; v2@18740.49,10622.27 v2(21154.38,10622.27)
  Component Side w40: v2(18738.9,11070.43) 18738.9,11816.12 C52.2@18741.42,11818.64 ; v2@18745.49,10717.27 v2(20319.38,10717.27) ; C52.2@18746.47,11818.69 C50.1@19035.31,11818.69 PWR_20V.1@19200.31,11818.69
  Solder Side w20: v2@21149.02,9312.27 21153.99,9312.27 v2(21154.38,9312.27)
  Solder Side w30: v2(18119.38,6072.27) v2(18119.38,6922.27) v2(18119.38,8177.27) v2(18119.38,9207.27) 18119.38,10207.27 18294.38,10382.27 v2(18294.38,11072.27) ; v2@20314.38,5902.27 v2(20314.38,5912.27) v2(20314.38,8417.27) v2(20314.38,9262.27) ; v2@21154.38,5982.27 v2(21154.38,6642.27) v2(21154.38,8487.27) v2(21154.38,9312.27) v2(21154.38,10622.27)
  Solder Side w40: v2(18740.49,10623.38) v2@18740.49,11072.27 ; v2(20314.38,9262.27) v2@20314.38,10712.27
  other v2: 18739.38,10717.27
ADC_CNV: U1.38 U7.6 | length 2271.8
  Component Side w10: U7.6@21950.64,5518.53 23125.64,5518.53 23451.89,5844.78 U1.38@23451.89,6480.2
ADC_SCK: U1.36 U7.8 | length 2174.8
  Component Side w10: U7.8@21950.64,5557.9 23055.01,5557.9 23412.52,5915.41 U1.36@23412.52,6480.2
ADC_SDI: U1.35 U7.9 | length 2123.1
  Component Side w10: U7.9@21950.64,5577.58 23014.06,5577.58 ; 23014.38,5577.27 23392.84,5955.72 U1.35@23392.84,6480.2
ADC_SDO: U1.37 U7.7 | length 2226.2
  Component Side w10: U7.7@21950.64,5538.21 23095.32,5538.21 23432.21,5875.09 U1.37@23432.21,6480.2
AGND: C30.1 C31.1 C32.2 C33.2 C34.1 C35.2 C36.1 C37.2 C42.1 C43.2 C44.1 C45.1 C46.1 C47.2 C48.1 C49.1 C50.2 C51.1 C52.1 C53.2 C54.1 C55.1 C56.1 C60.2 C61.2 C62.1 C71.2 C72.2 C73.2 C74.2 C75.2 C76.2 C78.1 C79.1 C80.2 C82.1 C83.1 C84.1 C85.1 C86.1 C89.1 C90.2 C91.1 C92.1 C110.1 C111.2 C112.1 C113.1 C114.1 C115.2 C116.1 C117.1 C118.1 C120.1 C122.1 C124.1 C126.1 C129.1 C130.1 C131.1 C132.1 C134.1 C136.1 C137.1 C138.1 C139.1 C140.1 C143.1 C145.1 C147.1 C148.1 C149.1 C150.1 C151.1 C153.1 C155.1 C157.1 C160.1 C161.1 C162.1 C163.1 L3.1 PWR_5V.2 PWR_20V.2 Q1.2 Q2.2 Q3.2 Q4.2 Q9.2 Q10.2 Q11.2 Q12.2 Q13.2 Q14.2 Q15.2 Q16.2 Q17.2 Q18.2 Q19.2 Q20.2 R9.2 R17.1 R23.1 R35.1 R37.1 R61.2 R64.2 R68.2 R71.2 R75.2 R78.2 R82.2 R85.2 R90.2 U3.4 U3.9 U3.16 U4.4 U4.9 U4.16 U5.4 U6.2 U7.4 U7.5 U8.2 U8.4 U8.5 U8.10 U9.2 U19.4 U26.2 U34.6 U34.7 U37.6 U37.7 U40.6 U40.7 U43.6 U43.7 | length 2583
  Component Side w10: C30.1@17974.38,8022.27 C30.1@17974.38,8037.27 ; v1(18028.15,7780.52) 18087.98,7780.52 C92.1@18113.57,7806.11 ; 19385.31,11766.84 PWR_20V.2@19442.16,11823.69 19445.31,11823.69 19505.31,11883.69 ; U8.2@19824.38,5732.58 19864.06,5732.58 ; U8.10@20017.29,5752.27 20059.38,5752.27 v3(20079.38,5772.27) ; C89.1@20308.63,5604.51 20308.63,5578.85 20338.74,5548.75 ; v1(20419.38,6441.52) R61.2@20541.64,6441.52 ; v1(20489.38,9792.27) 20548.4,9792.27 R75.2@20549.14,9791.52 ; R68.2@20549.14,7121.52 20548.4,7122.27 20549.38,7123.25 v1(20549.38,7167.27) ; R82.2@20549.14,8981.52 20548.4,8982.27 20549.38,8983.25 v1(20549.38,9032.27) ; v1@20883.71,7781.52 C72.2@20964.14,7781.52 ; v1@20890.74,8181.52 C75.2@20964.14,8181.52 ; 20943.24,6864.77 R71.2@20997.1,6864.77 ; 20959.46,9527.27 R78.2@21004.14,9527.27 ; v1@21112.67,8255.55 21129.58,8272.46 U4.4@21195.17,8272.46 ; U3.4@21194.38,7871.67 21265.23,7871.67 ; v1@21273.44,6077.26 21306.35,6044.35 ; 21309.45,9379.43 21349.38,9339.5 C148.1@21349.38,9312.27 ; C137.1@21354.38,6642.27 v1@21398.6,6686.49 ; C160.1@21354.38,8492.27 21354.38,8494.85 v1@21399.57,8540.04 ; 21679.38,6063.21 U34.7@21761.84,6063.21 ; 21714.38,8617.27 U43.7@21761.35,8617.27 ; 21720.32,6783.21 U37.7@21762.29,6783.21 ; 21720.32,9438.21 U40.7@21762.29,9438.21 ; U7.4@21779.38,5538.21 21818.43,5538.21 ; 22345.31,11868.69 22460.31,11753.69
  Component Side w20: U26.2@18002.61,7844.98 18002.61,7803.18 v1@18026.07,7779.71 ; Q14.2@20399.2,6295.02 v2(20469.38,6295.02) ; Q17.2@20414.66,8835.02 20416.9,8837.27 v2(20494.38,8837.27) ; Q15.2@20422.41,6957.27 v2(20509.38,6957.27) ; Q16.2@20424.66,9635.02 v2(20502.13,9635.02) ; U6.2@21261.15,5609.55 21261.15,5644.04
  Solder Side w10: 19390.31,11875.54 PWR_20V.2@19442.16,11823.69 19500.31,11765.54 ; 22335.31,11758.69 22450.31,11873.69 22465.31,11873.69
  other v1: 19369.38,5237.27 19449.38,5237.27 19529.38,5237.27 21514.38,5237.27 21594.38,5237.27 21674.38,5237.27 21754.38,5237.27 21834.38,5237.27 20529.38,5242.27 20609.38,5242.27 20689.38,5242.27 20769.38,5242.27 20849.38,5242.27 20929.38,5242.27 18319.38,5257.27 18399.38,5257.27 18479.38,5257.27 17569.38,5287.27 17098.29,5315.91 17178.29,5315.91 17258.29,5315.91 19369.38,5317.27 19449.38,5317.27 19529.38,5317.27 18319.38,5337.27 18399.38,5337.27 18479.38,5337.27 17569.38,5367.27 17098.29,5395.91 17178.29,5395.91 17258.29,5395.91 17569.38,5447.27 21989.38,5452.27 22069.38,5452.27 18989.38,5522.27 19069.38,5522.27 19149.38,5522.27 19229.38,5522.27 19309.38,5522.27 19469.38,5522.27 19544.38,5522.27 17569.38,5527.27 19884.38,5567.27 19964.22,5568.04 20949.41,5594 20634.38,5597.27 20024.38,5607.27 19279.38,5672.27 19359.38,5672.27 19439.38,5672.27 20949.41,5674 20634.38,5677.27 21234.74,5677.57 21290.61,5679.97 20386.1,5728.74 19279.38,5742.27 19899.38,5747.27 21134.38,5752.27 21214.38,5752.27 21859.38,5757.27 21939.38,5757.27 22019.38,5757.27 20341.59,5770.91 19899.38,5812.27 21859.38,5837.27 21939.38,5837.27 22019.38,5837.27 21689.38,5882.27 20719.38,5917.27 20799.38,5917.27 20879.38,5917.27 19799.38,5952.27 21689.38,5962.27 21074.38,5967.27 20414.63,6015.89 19134.38,6017.27 19214.38,6017.27 19294.38,6017.27 20019.38,6037.27 18559.38,6062.27 19799.38,6072.27 21272.76,6080.45 20414.63,6095.89 20019.38,6117.27 18559.38,6142.27 19384.38,6232.27 19464.38,6232.27 20924.38,6252.27 21754.38,6257.27 17409.38,6312.27 17270.12,6316.05 20924.38,6332.27 21754.38,6337.27 17409.38,6392.27 17270.12,6396.05 18579.38,6402.27 21399.38,6432.27 20009.38,6457.27 17409.38,6472.27 17270.12,6476.05 18579.38,6482.27 21569.38,6482.27 21759.38,6487.27 21399.38,6512.27 18184.38,6527.27 20009.38,6537.27 18579.38,6562.27 19379.38,6577.27 19459.38,6577.27 18184.38,6607.27 20824.38,6617.27 20904.38,6617.27 21759.38,6627.27 18579.38,6642.27 20432.04,6682.31 21398.62,6687.17 21759.38,6707.27 18264.38,6762.27 18344.38,6762.27 20432.04,6762.31 20909.38,6917.27 19379.38,6922.27 19459.38,6922.27 20909.38,6997.27 18539.38,7022.27 18619.38,7022.27 18539.38,7102.27 18619.38,7102.27 21554.38,7117.27 20004.38,7127.27 21754.38,7127.27 21239.38,7137.27 21554.38,7197.27 20004.38,7207.27 21754.38,7207.27 20704.38,7212.27 20799.38,7212.27 21239.38,7217.27 19389.38,7282.27 19469.38,7282.27 18214.38,7392.27 18249.38,7622.27 18329.38,7622.27 19394.38,7627.27 19474.38,7627.27 21773.42,7640.58 20714.38,7642.27 20794.38,7642.27 21999.38,7642.27 22079.38,7642.27 21773.42,7720.58 21999.38,7722.27 22079.38,7722.27 20885.47,7780.21 21275.02,7886.77 17389.38,7942.27 17250.12,7946.05 20704.38,7952.27 20784.38,7952.27 19394.38,7967.27 19474.38,7967.27 21275.02,7966.77 22004.38,8007.27 22084.38,8007.27 17389.38,8022.27 17250.12,8026.05 20704.38,8032.27 20784.38,8032.27 18564.38,8082.27 22004.38,8087.27 22084.38,8087.27 17389.38,8102.27 17250.12,8106.05 18564.38,8162.27 20889.9,8180.99 18564.38,8242.27 21109.38,8242.27 21270.73,8308.43 18564.38,8322.27 20684.38,8322.27 20764.38,8322.27 19389.38,8332.27 19469.38,8332.27 21270.73,8388.43 21759.38,8392.27 20684.38,8402.27 20764.38,8402.27 21400,8403.41 22093.08,8454.84 21759.38,8472.27 22093.08,8534.84 21398.7,8541.93 18219.38,8622.27 21219.38,8627.27 19399.38,8672.27 19479.38,8672.27 20924.38,8757.27 21934.38,8817.27 22014.38,8817.27 22094.38,8817.27 20924.38,8837.27 21934.38,8877.27 22014.38,8877.27 22094.38,8877.27 18204.38,8922.27 18284.38,8922.27 21399.01,8962.55 21240.93,8969.66 20709.89,8978.33 21933.78,9026.05 22013.78,9026.05 22093.78,9026.05 19399.38,9032.27 19479.38,9032.27 19559.38,9032.27 21399.01,9042.55 20770.29,9048.23 21240.93,9049.66 18529.38,9222.27 19399.38,9242.27 19479.38,9242.27 19559.38,9242.27 20864.38,9277.27 20944.38,9277.27 18529.38,9302.27 20464.32,9340.47 20864.38,9357.27 20944.38,9357.27 18529.38,9382.27 21269.38,9392.27 20464.32,9420.47 17399.38,9497.27 17260.12,9501.05 20924.38,9567.27 17399.38,9577.27 17260.12,9581.05 19429.38,9612.27 19509.38,9612.27 18929.38,9617.27 19009.38,9617.27 19719.38,9617.27 20924.38,9647.27 17399.38,9657.27 17260.12,9661.05 18254.38,9677.27 19429.38,9692.27 19509.38,9692.27 18929.38,9697.27 19009.38,9697.27 19719.38,9697.27 19429.38,9772.27 19509.38,9772.27 18929.38,9777.27 19009.38,9777.27 19719.38,9777.27 22224.38,9837.27 22304.38,9837.27 18229.38,9902.27 18309.38,9902.27 22224.38,9917.27 22304.38,9917.27 21499.38,9967.27 21579.38,9967.27 21659.38,9967.27 20724.38,9972.27 20804.38,9972.27 22224.38,9997.27 22304.38,9997.27 21499.38,10047.27 21579.38,10047.27 21659.38,10047.27 20724.38,10052.27 20804.38,10052.27 24089.38,10052.27 24169.38,10052.27 24249.38,10052.27 24679.38,10052.27 24759.38,10052.27 24839.38,10052.27 24089.38,10132.27 24169.38,10132.27 24249.38,10132.27 24679.38,10132.27 24759.38,10132.27 24839.38,10132.27 20629.38,10307.27 20709.38,10307.27 20789.38,10307.27 18924.38,10317.27 19004.38,10317.27 19869.38,10317.27 19949.38,10317.27 17774.38,10372.27 17854.38,10372.27 25271.47,10523.67 25351.47,10523.67 25271.47,10603.67 25351.47,10603.67 21549.38,10662.27 21629.38,10662.27 25271.47,10683.67 25351.47,10683.67 23394.38,10697.27 23474.38,10697.27 22234.38,10722.27 22314.38,10722.27 20591.64,10732.88 20671.64,10732.88 20751.64,10732.88 20831.64,10732.88 21549.38,10742.27 21629.38,10742.27 24073.96,10764.76 24153.96,10764.76 24233.96,10764.76 23394.38,10777.27 23474.38,10777.27 20591.64,10812.88 20671.64,10812.88 20751.64,10812.88 20831.64,10812.88 24073.96,10844.76 24153.96,10844.76 24233.96,10844.76 24073.96,10924.76 24153.96,10924.76 24233.96,10924.76 22068.04,11162.35 22148.04,11162.35 22228.04,11162.35 22308.04,11162.35 24749.83,11214.18 24829.83,11214.18 24909.83,11214.18 24989.83,11214.18 19307.83,11227.87 19387.83,11227.87 19467.83,11227.87 19547.83,11227.87 18194.38,11242.27 18274.38,11242.27 22068.04,11242.35 22148.04,11242.35 22228.04,11242.35 22308.04,11242.35 20490.79,11261.44 20570.79,11261.44 20650.79,11261.44 20730.79,11261.44 24749.83,11294.18 24829.83,11294.18 24909.83,11294.18 24989.83,11294.18 19307.83,11307.87 19387.83,11307.87 19467.83,11307.87 19547.83,11307.87 18194.38,11322.27 18274.38,11322.27 20490.79,11341.44 20570.79,11341.44 20650.79,11341.44 20730.79,11341.44 24749.83,11374.18 24829.83,11374.18 24909.83,11374.18 24989.83,11374.18 19307.83,11387.87 19387.83,11387.87 19467.83,11387.87 19547.83,11387.87 18194.38,11402.27 18274.38,11402.27 20490.79,11421.44 20570.79,11421.44 20650.79,11421.44 20730.79,11421.44 22300.31,11568.69 22380.31,11568.69 22460.31,11568.69 17572.66,11610.26 17652.66,11610.26 17732.66,11610.26 22300.31,11648.69 22380.31,11648.69 22460.31,11648.69 24103.16,11666.26 24183.16,11666.26 24263.16,11666.26 24343.16,11666.26 19365.31,11683.69 19445.31,11683.69 19525.31,11683.69 17572.66,11690.26 17652.66,11690.26 17732.66,11690.26 24103.16,11746.26 24183.16,11746.26 24263.16,11746.26 24343.16,11746.26 20880.31,11758.69 20960.31,11758.69 21040.31,11758.69 17572.66,11770.26 17652.66,11770.26 17732.66,11770.26 24103.16,11826.26 24183.16,11826.26 24263.16,11826.26 24343.16,11826.26 20880.31,11838.69 20960.31,11838.69 21040.31,11838.69 17572.66,11850.26 17652.66,11850.26 17732.66,11850.26 17572.66,11930.26 17652.66,11930.26 17732.66,11930.26 17572.66,12010.26 17652.66,12010.26 17732.66,12010.26 17572.66,12090.26 17652.66,12090.26 17732.66,12090.26
CTRL1: Q1.1 U1.20 | length 4837.3
  Component Side w10: Q1.1@19661.9,8457.27 Q1.1@19659.66,8455.02 v3@19736.62,8455.02 ; v1(19739.38,7557.27) 22159.38,7557.27 22929.36,6787.29 U1.20@23282.6,6787.29
  Solder Side w10: v1(19739.38,7557.27) v3(19739.38,8452.27)
CTRL2: Q2.1 U1.21 | length 4514.9
  Component Side w10: Q2.1@19659.66,8110.02 v3@19776.62,8110.02 ; v1(19779.38,7527.27) 22144.38,7527.27 22904.05,6767.6 U1.21@23282.6,6767.6
  Solder Side w10: v1(19779.38,7527.27) v3(19779.38,8107.27)
CTRL3: Q3.1 U1.22 | length 4206.1
  Component Side w10: Q3.1@19659.66,7760.02 v3(19811.62,7760.02) ; v1(19814.38,7492.27) 22134.38,7492.27 22878.73,6747.92 U1.22@23282.6,6747.92
  Solder Side w10: v1(19814.38,7492.27) 19814.38,7757.27 v3(19811.62,7760.02) 19817.13,7760.02 v3@19819.38,7762.27
CTRL4: Q4.1 U1.23 | length 3938.3
  Component Side w10: Q4.1@19659.66,7405.02 19722.13,7405.02 19764.38,7447.27 22139.38,7447.27 22858.42,6728.23 U1.23@23282.6,6728.23
CTRL9: Q9.1 U1.28 | length 4847.8
  Component Side w10: Q9.1@19659.66,7065.02 v3@19857.13,7065.02 ; v1(19859.38,7412.27) 22119.38,7412.27 v1(22124.38,7407.27) ; v1(22124.38,6557.27) 22674.38,6557.27 22746.92,6629.8 U1.28@23282.6,6629.8
  Solder Side w10: v3(19859.38,7067.27) v1(19859.38,7412.27) ; v1(22124.38,6557.27) v1(22124.38,7407.27)
CTRL10: Q10.1 U1.55 | length 6939.5
  Component Side w10: Q10.1@19659.66,6720.02 v3(19816.62,6720.02) ; v3(19819.38,7372.27) v1(22084.38,7372.27) ; v1(22084.38,6512.27) v1(22724.38,6512.27) ; U1.55@23719.61,6669.18 24147.47,6669.18 v1(24209.38,6607.27)
  Solder Side w10: v3@19819.38,6722.27 v3(19819.38,7372.27) ; v1(22084.38,6512.27) v1(22084.38,7372.27) ; v1(22724.38,6512.27) 22724.38,6472.27 23009.38,6187.27 23824.38,6187.27 24029.38,6392.27 24029.38,6452.27 24184.38,6607.27 v1(24209.38,6607.27)
CTRL11: Q11.1 U1.56 | length 7181.1
  Component Side w10: Q11.1@19659.66,6375.02 v3@19776.62,6375.02 ; v3(19776.88,7334.77) 19779.38,7337.27 v1(22034.38,7337.27) ; v1(22039.38,6472.27) 22041.88,6469.77 v1(22791.88,6469.77) ; U1.56@23719.61,6688.86 24182.79,6688.86 v1(24204.38,6667.27)
  Solder Side w10: v3(19776.88,7334.77) 19776.88,6374.77 v3(19779.38,6372.27) ; v1@22034.38,6472.27 v1(22034.38,7337.27) ; v1(22791.88,6469.77) 23044.38,6217.27 23799.38,6217.27 23974.38,6392.27 23974.38,6437.27 v1(24204.38,6667.27)
CTRL12: Q12.1 U1.33 | length 6096.4
  Component Side w10: Q12.1@19659.66,6015.02 v3@19732.13,6015.02 ; v3(19739.38,7302.27) v1@21989.38,7302.27 ; v1(21994.38,6422.27) 22679.38,6422.27 22864.38,6237.27 23234.38,6237.27 23353.47,6356.35 U1.33@23353.47,6480.2
  Solder Side w10: v3@19739.38,6012.27 v3(19739.38,6017.27) v3(19739.38,7302.27) ; v1(21994.38,6422.27) v1(21994.38,7297.27)
CTRL13: Q13.1 U1.34 | length 6429.9
  Component Side w10: Q13.1@19659.66,8815.02 v3@19696.62,8815.02 ; v3@19704.38,7267.27 v1(21954.38,7267.27) ; v1(21954.38,6377.27) 22664.38,6377.27 22844.38,6197.27 23239.38,6197.27 23373.15,6331.04 U1.34@23373.15,6480.2
  Solder Side w10: v3(19699.38,7267.27) v3(19699.38,8812.27) v3@19699.38,8822.27 ; v1(21954.38,6377.27) v1(21954.38,7267.27)